# Altium PCB Control Board 4Layer.PcbDoc (part 1 of 2)
Units mm, origin at the board's own origin, x right, y up, seen from the top; angles counter-clockwise.
Board outline 113.54 x 134.37 mm, 4 copper layers (Top Layer, GND, Power, Bottom Layer), stack 0.603 mm thick; 245 components, 154 nets, 759 pads, 365 vias.
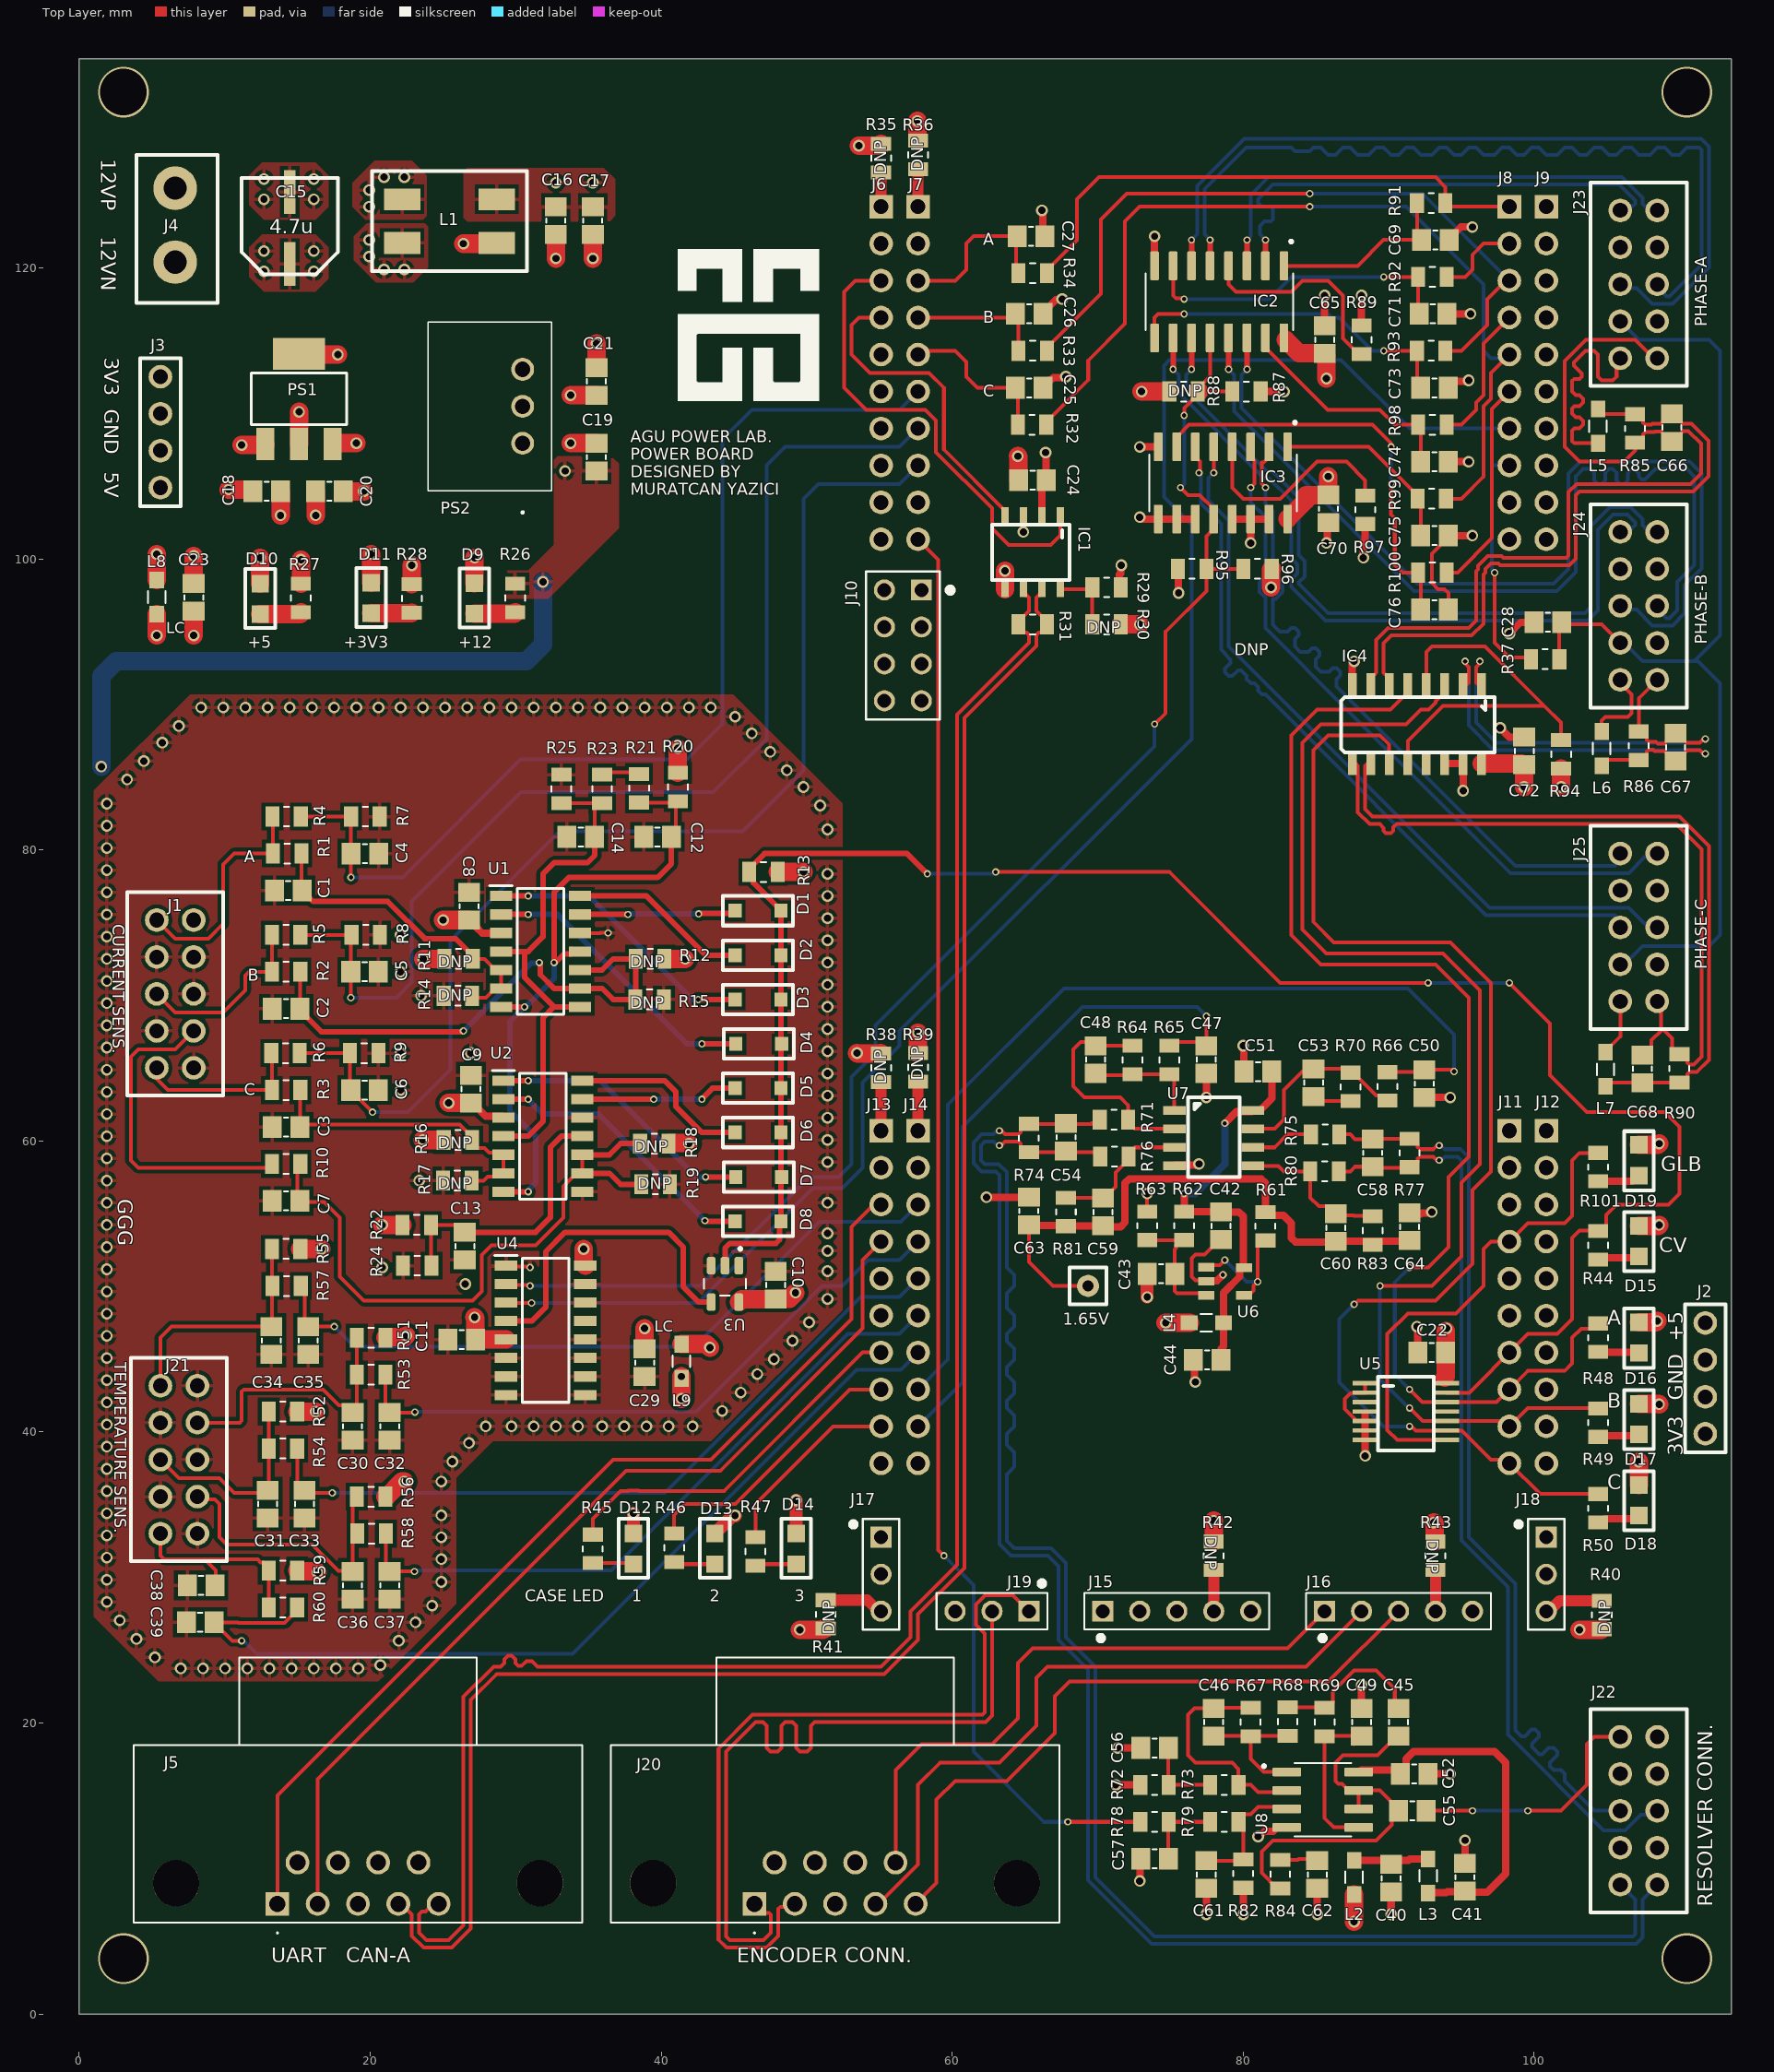
[diagram p0: Top Layer view]
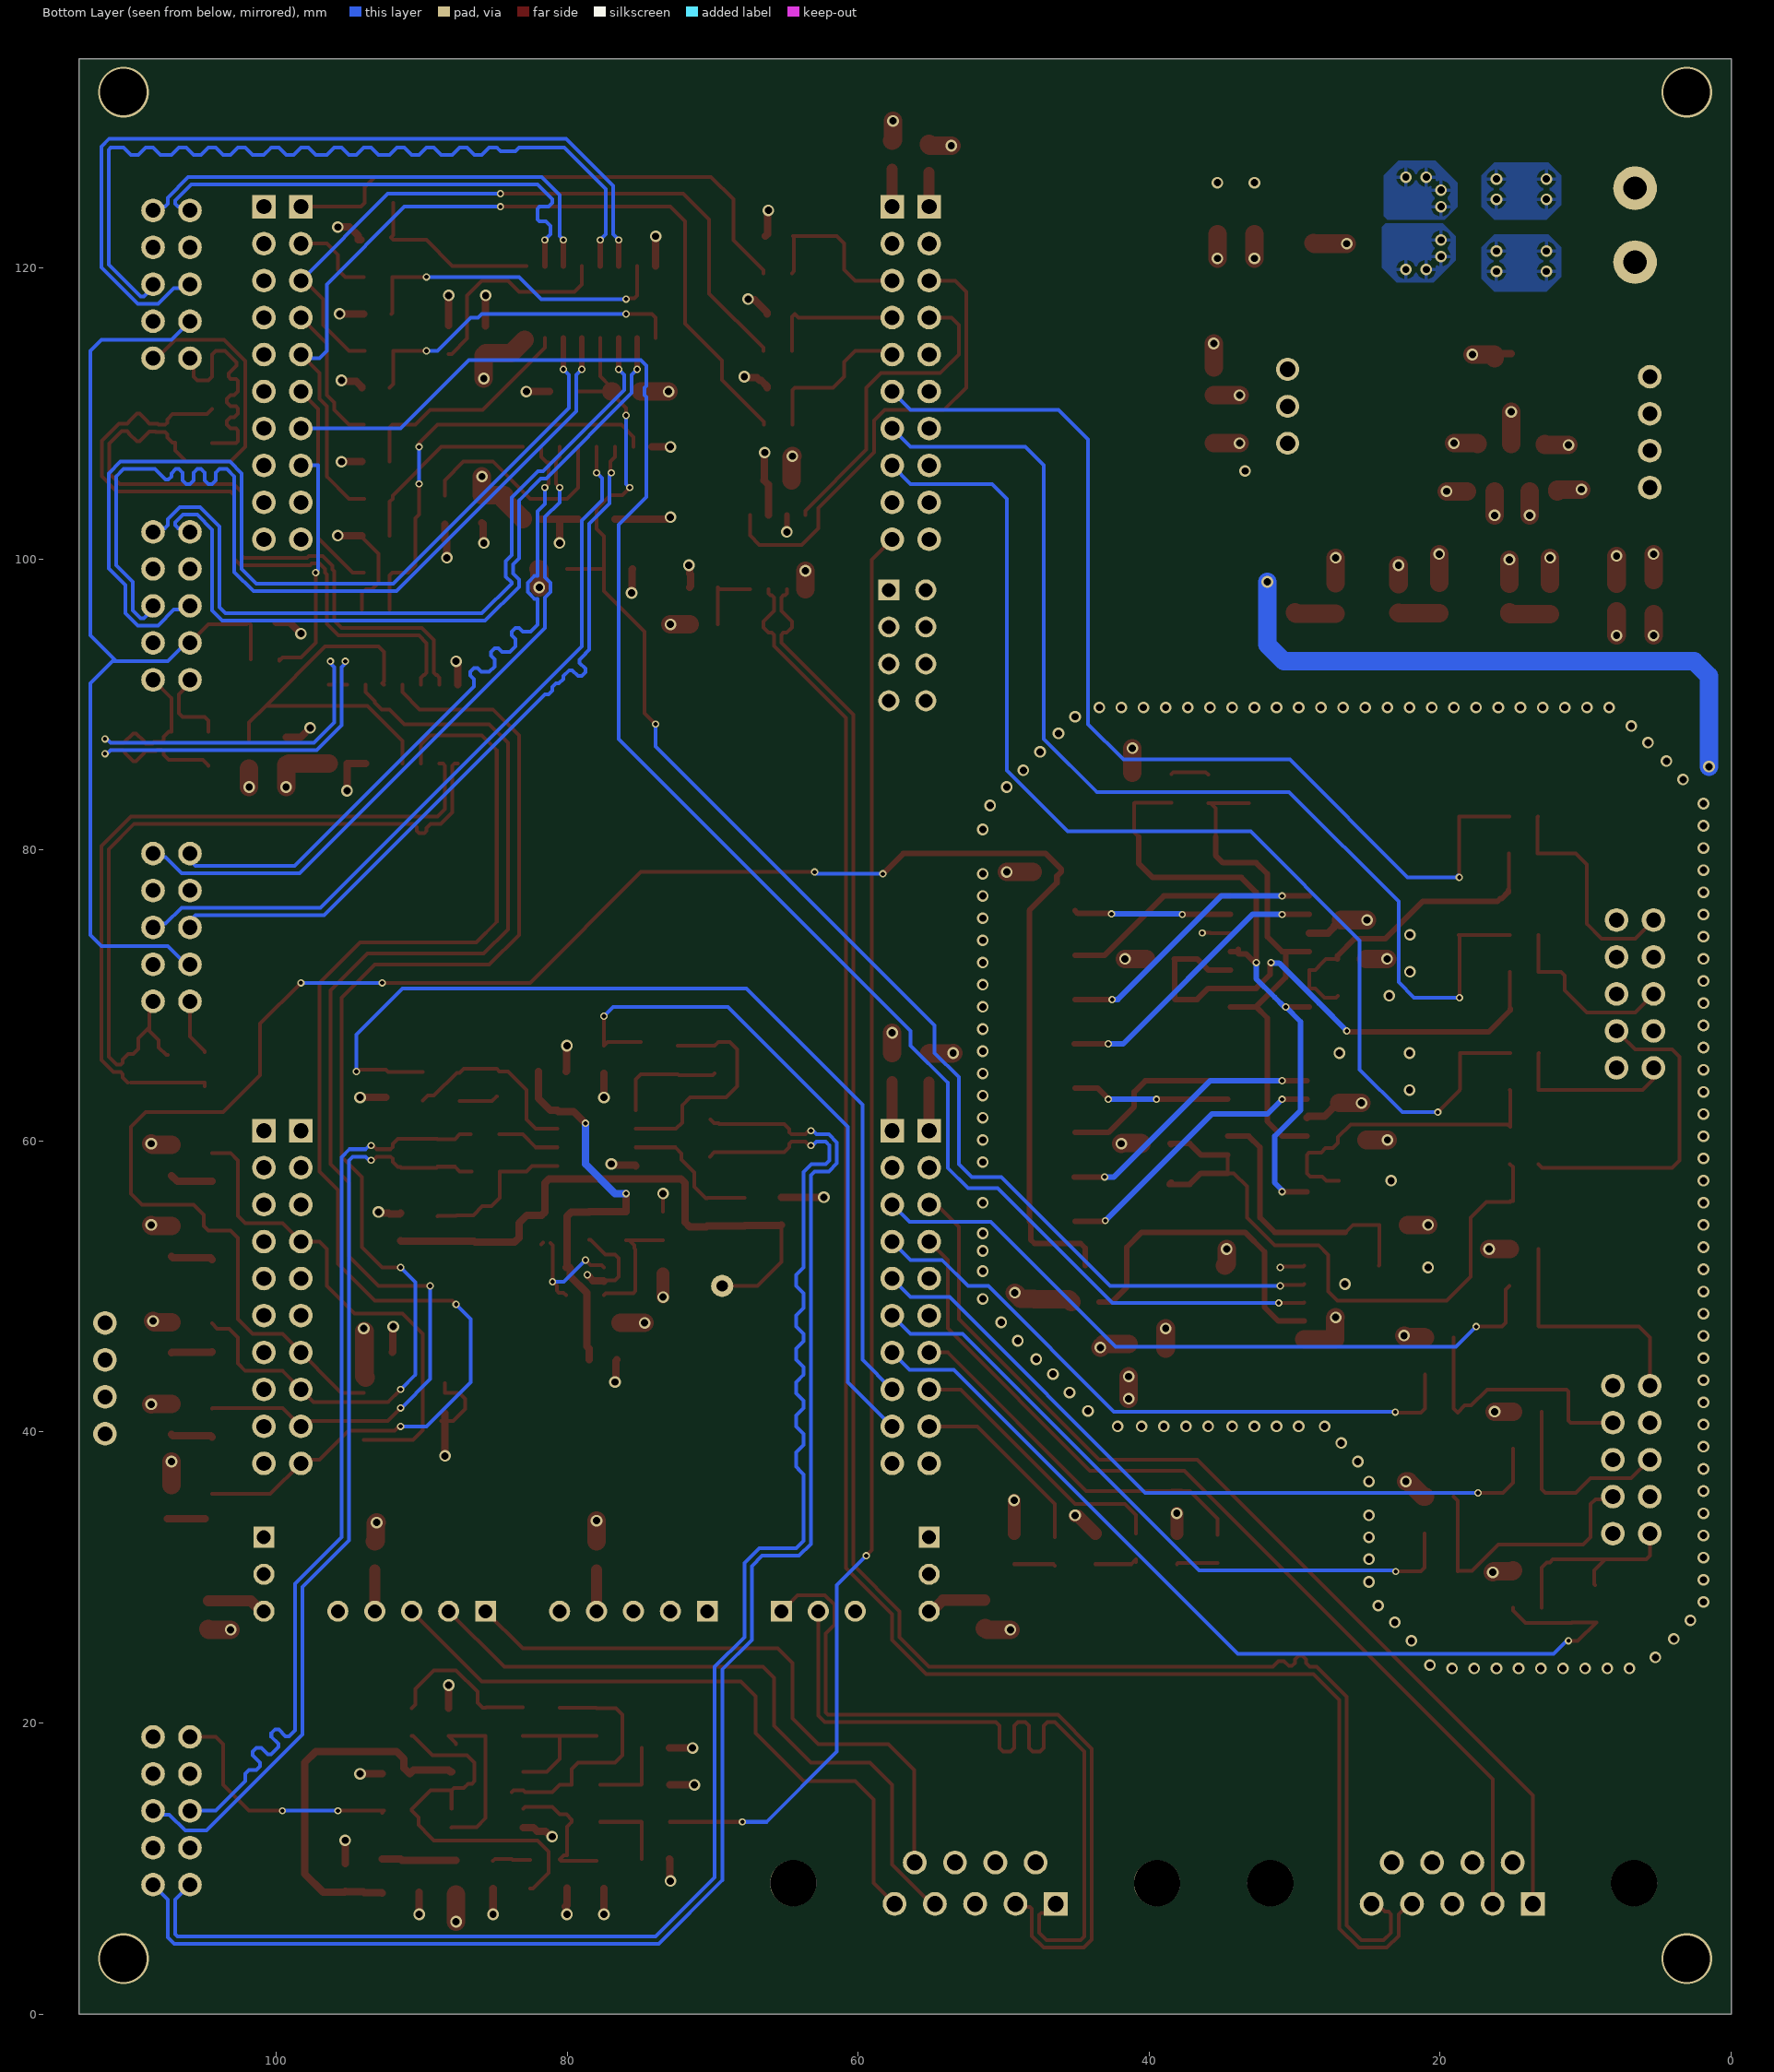
[diagram p1: Bottom Layer view, seen from below]
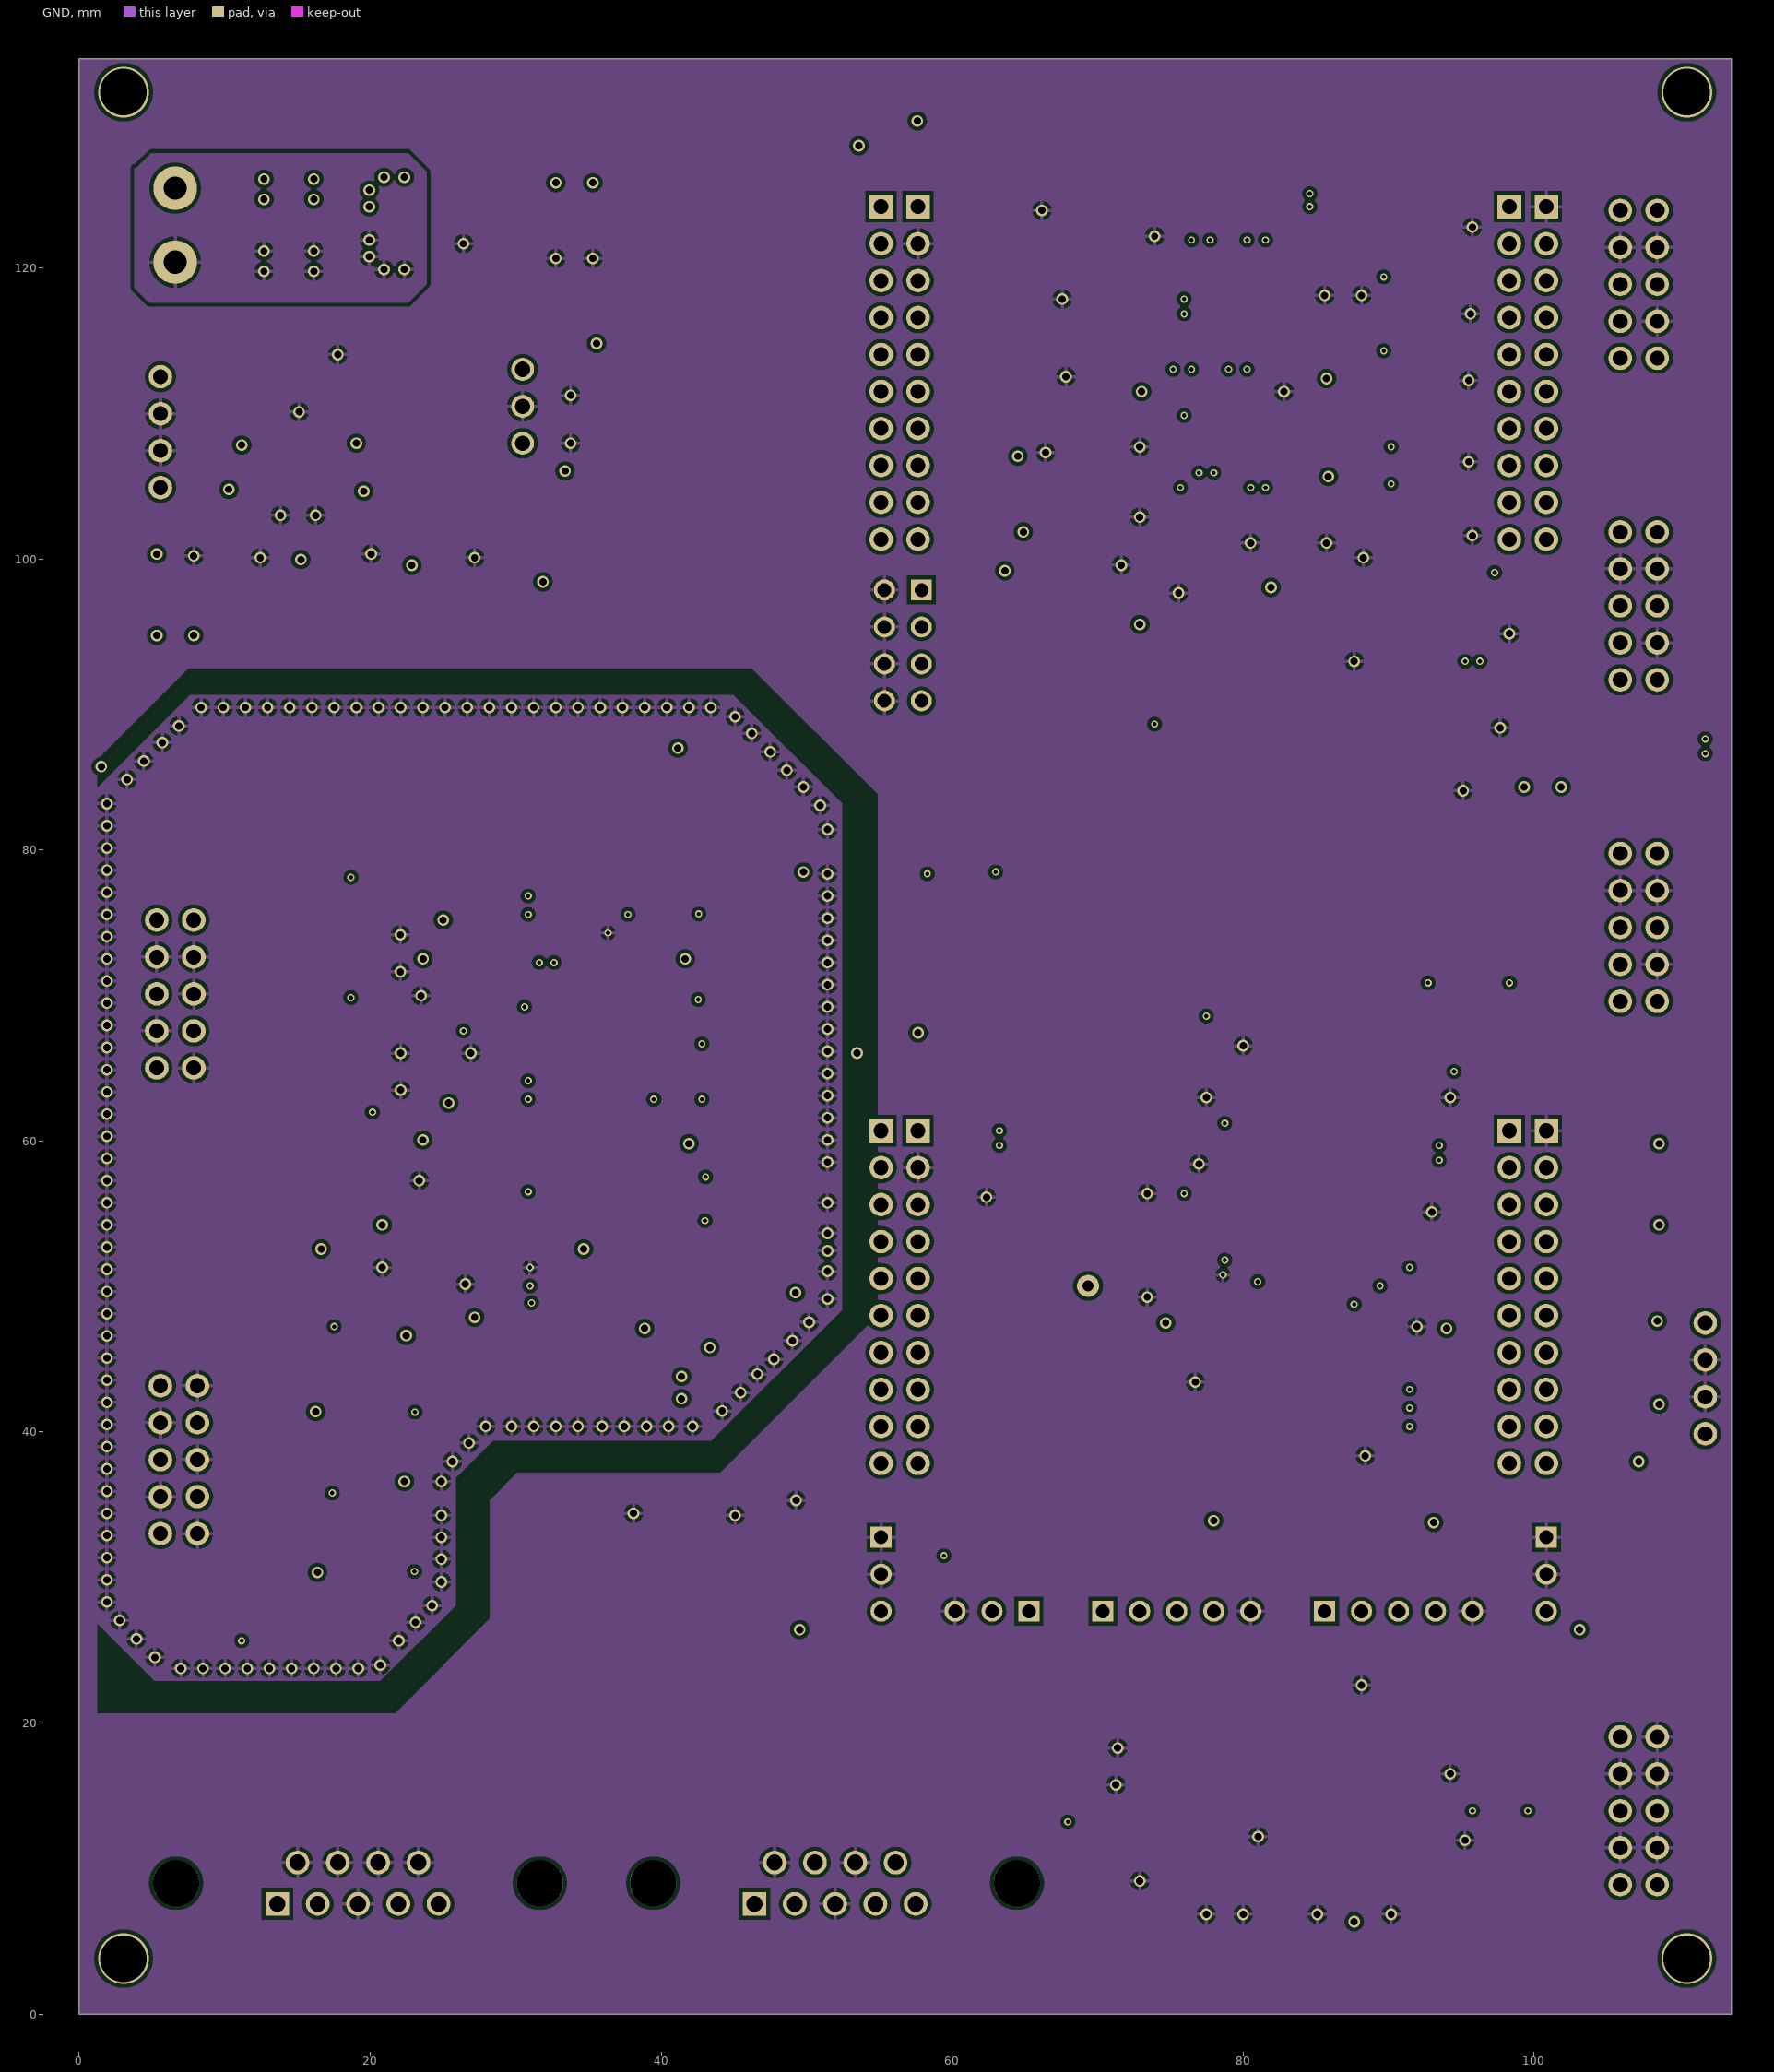
[diagram p2: GND]
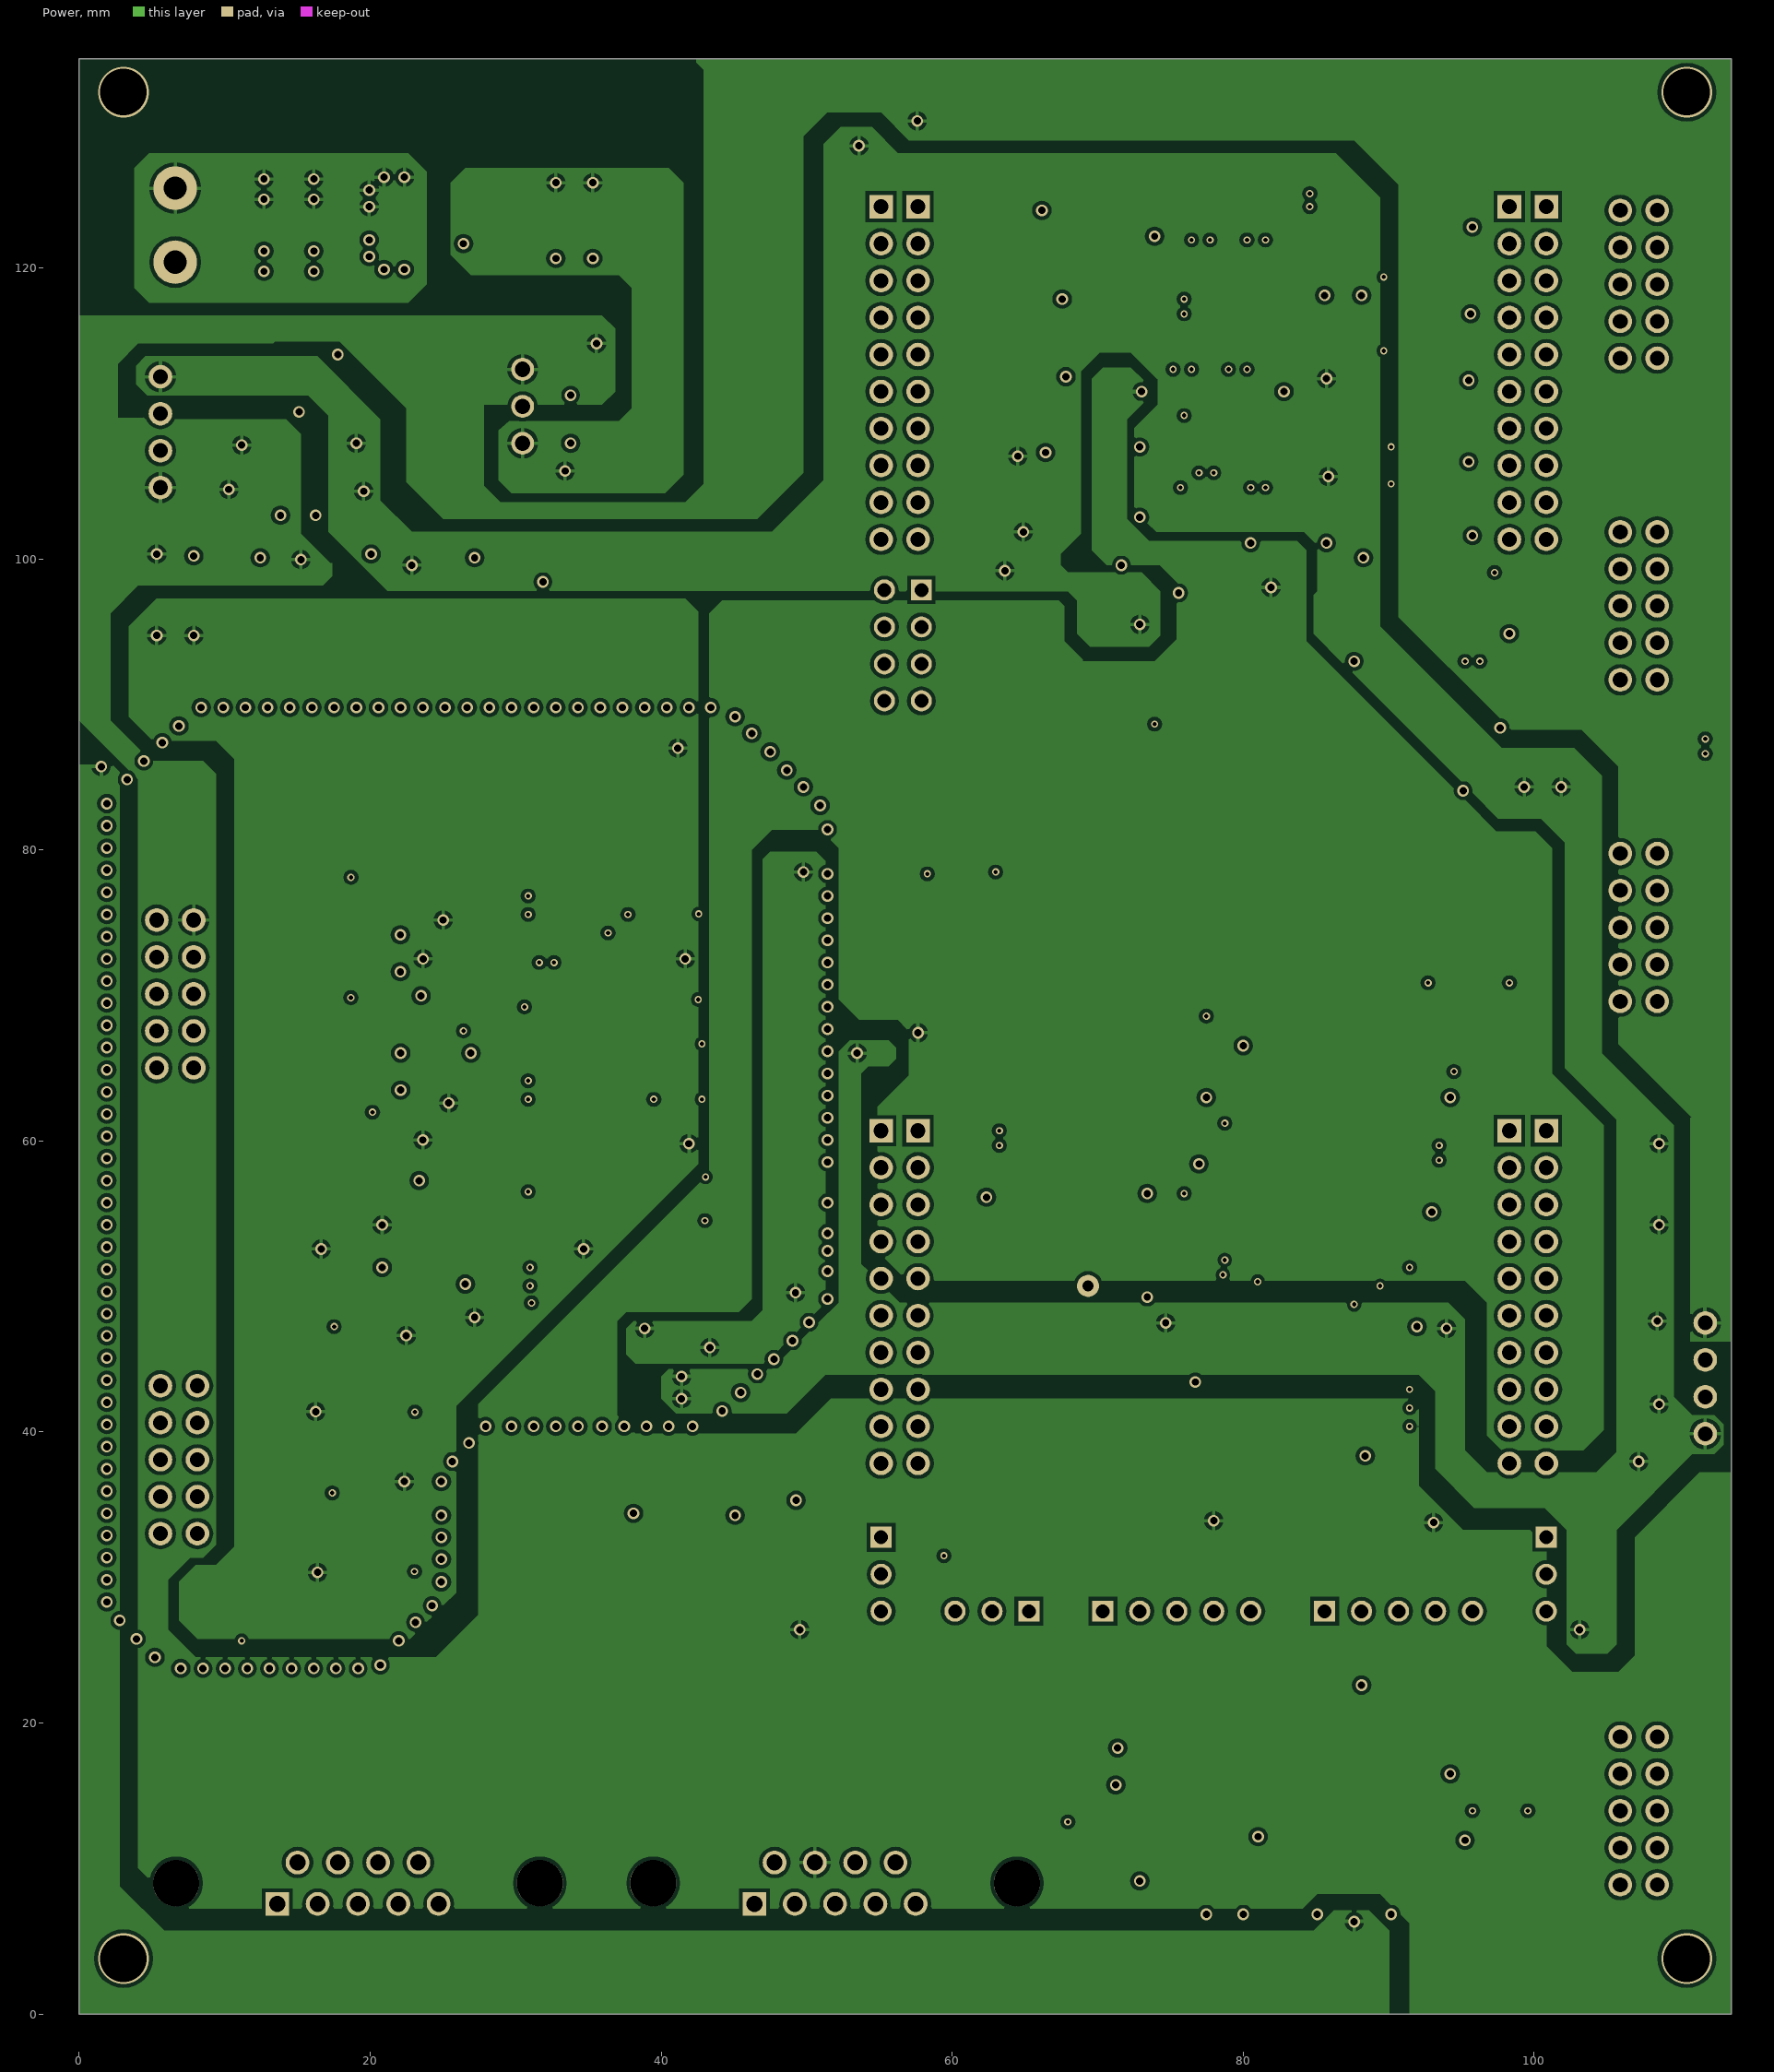
[diagram p3: Power]

## Layer stack, top to bottom
Top Solder: solder mask 0.0102, Solder Resist, Dk 3.5
Top Layer: signal copper 0.0356
Dielectric 2: prepreg 0.0711, PP-006, Dk 4.1
GND: signal copper 0.035
Dielectric 3: prepreg 0.0711, PP-006, Dk 4.1
Power: signal copper 0.035
Dielectric 1: dielectric 0.32, FR-4, Dk 4.8
Bottom Layer: signal copper 0.0356
Bottom Solder: solder mask 0.0102, Solder Resist, Dk 3.5

## Board outline
0,0 113.538,0 113.538,134.366 0,134.366

## Design rules (kind name [scope] priority, off if disabled: settings)
Clearance [All] p1: gap=0.254 ignorepadtopadclearanceinfootprint=FALSE except(0: Arc-Hole Track-Hole SMDPad-Hole THPad-Hole Via-Hole Fill-Hole Poly-Hole Region-Hole Text-Hole)
DiffPairsRouting [All] p1: maxlimit=0.254 minlimit=0.254 mostfreqgap=0.254 toplayer_minwidth=0.254 toplayer_maxwidth=2.54 toplayer_prefwidth=0.254 midlayer1_minwidth=0.381 midlayer1_maxwidth=0.381 midlayer1_prefwidth=0.381 midlayer2_minwidth=0.381 midlayer2_maxwidth=0.381 midlayer2_prefwidth=0.381 bottomlayer_minwidth=0.254 bottomlayer_maxwidth=2.54 bottomlayer_prefwidth=0.254 maxuncoupledlength=12.7
HoleSize [All] p1: absolutevalues=TRUE maxlimit=5.08 minlimit=0.2 maxpercent=80.000 minpercent=20.000
HoleToHoleClearance [All] p1: gap=0.5 allowstackedmicrovias=TRUE
MinimumSolderMaskSliver [All] p1: minsoldermaskwidth=0
PolygonConnect [All] p1: connectstyle=Relief reliefconductorwidth=0.254 reliefentries=4 polygonreliefangle="90 Angle" airgapwidth=0.254
RoutingVias [All] p1: holewidth=0.711 width=1.27 viastyle="Through Hole" minholewidth=0.2 minwidth=0.4 maxholewidth=2.54 maxwidth=2.54
SilkToSilkClearance [All] p1: silktosilkclearance=0
SilkToSolderMaskClearance [IsPad] p1: minsilkscreentomaskgap=0 clearancetoexposedcopper=TRUE
SolderMaskExpansion [All] p1: expansion=0.102 istentingtop=FALSE
Width [All] p1: maxlimit=2.54 minlimit=0.254 preferedwidth=0.254 midlayer1_maxwidth=0.254 midlayer2_maxwidth=0.254 minimp=50.000000 maximp=50.000000 favimp=50.000000
24 further rules are at their usual default settings.

## Classes and differential pairs
differential pair class DIFF90: A-FAULT-FILT AHS_PWM ALS_PWM B-FAULT-FILT BHS_PWM BLS_PWM C-FAULT-FILT CANA CANB CHS_PWM CLS_PWM COS SIN
component class "Voltage Sensor Interface": C25 C26 C27 R32 R33 R34
component class "Temp Sensor Interface": C30 C31 C32 C33 C34 C35 C36 C37 C38 C39 J21 R51 R52 R53 R54 R55 R56 R57 R58 R59 R60
component class Resolver: 1.65V C40 C41 C42 C43 C44 C45 C46 C47 C48 C49 C50 C51 C52 C53 C54 C55 C56 C57 C58 C59 C60 C61 C62 C63 C64 J22 L2 L3 L4 R61 R62 R63 R64 R65 R66 R67 R68 R69 R70 R71 R72 R73 R74 R75 R76 R77 R78 R79 R80 R81 R82 R83 R84 U6 U7 U8
component class PowerSupply: C15 C16 C17 C18 C19 C20 C21 C23 C29 D9 D10 D11 J2 J3 J4 L1 L8 L9 PS1 PS2 R26 R27 R28
component class Launchpad.~(23): C22 C28 D12 D13 D14 D15 D16 D17 D18 D19 J6 J7 J8 J9 J10 J11 J12 J13 J14 J15 J16 J17 J18 J19 J20 R35 R36 R37 R38 R39 R40 R41 R42 R43 R44 R45 R46 R47 R48 R49 R50 R101 U5
component class "Gate Driver Interface": C65 C66 C67 C68 C69 C70 C71 C72 C73 C74 C75 C76 IC2 IC3 IC4 J23 J24 J25 L5 L6 L7 R85 R86 R87 R88 R89 R90 R91 R92 R93 R94 R95 R96 R97 R98 R99 R100
component class FaultCircuit: C8 C9 C10 C11 C12 C13 C14 D1 D2 D3 D4 D5 D6 D7 D8 R11 R12 R13 R14 R15 R16 R17 R18 R19 R20 R21 R22 R23 R24 R25 U1 U2 U3 U4
component class "Current Sensor Interface": C1 C2 C3 C4 C5 C6 C7 J1 R1 R2 R3 R4 R5 R6 R7 R8 R9 R10
component class CAN: C24 IC1 J5 R29 R30 R31
differential pair SIN: +SIN_P -SIN_N
differential pair COS: +COS_P -COS_N
differential pair CLS_PWM: +CLS_PWM_P -CLS_PWM_N
differential pair CHS_PWM: +CHS_PWM_P -CHS_PWM_N
differential pair CANB: +CANB_P -CANB_N
differential pair CANA: +CANA_P -CANA_N
differential pair C-FAULT-FILT: +C-FAULT-FILT_P -C-FAULT-FILT_N
differential pair BLS_PWM: +BLS_PWM_P -BLS_PWM_N
differential pair BHS_PWM: +BHS_PWM_P -BHS_PWM_N
differential pair B-FAULT-FILT: +B-FAULT-FILT_P -B-FAULT-FILT_N
differential pair ALS_PWM: +ALS_PWM_P -ALS_PWM_N
differential pair AHS_PWM: +AHS_PWM_P -AHS_PWM_N
differential pair A-FAULT-FILT: +A-FAULT-FILT_P -A-FAULT-FILT_N

## Components (designator, comment, footprint, x,y, rotation, side; value= is the part's Value field where it differs from the comment)
1.65V "Test" TestPoint 69.342,50.038 r90 top (schematic designator 5)
C1 "33nF" "CAP 0805(2012 metric)" 14.366,77.216 r180 top
C2 "33nF" "CAP 0805(2012 metric)" 14.224,69.088 r180 top
C3 "33nF" "CAP 0805(2012 metric)" 14.224,60.96 r180 top
C4 "10nF" "CAP 0805(2012 metric)" 19.634,79.756 r0 top
C5 "10nF" "CAP 0805(2012 metric)" 19.624,71.628 r0 top
C6 "10nF" "CAP 0805(2012 metric)" 19.624,63.5 r0 top
C7 "33nF" "CAP 0805(2012 metric)" 14.224,55.88 r180 top
C8 "0.1uF" "CAP 0805(2012 metric)" 26.797,76.139 r270 top
C9 "0.1uF" "CAP 0805(2012 metric)" 26.924,63.566 r270 top
C10 "0.1uF" "CAP 0805(2012 metric)" 47.879,50.099 r90 top
C11 "0.1uF" "CAP 0805(2012 metric)" 26.289,46.355 r180 top
C12 "0.1uF" "CAP 0805(2012 metric)" 39.751,80.899 r180 top
C13 "0.1uF" "CAP 0805(2012 metric)" 26.505,52.771 r270 top
C14 "0.1uF" "CAP 0805(2012 metric)" 34.483,80.899 r180 top
C15 "47uF 25V" EEE-HC1E470XP 14.478,122.745 r0 top
C16 "10uF" "CAP 0805(2012 metric)" 32.766,123.256 r270 top
C17 "0.1uF 100V" "CAP 0805(2012 metric)" 35.306,123.256 r270 top
C18 "10uF" "CAP 0805(2012 metric)" 12.888,104.648 r180 top
C19 "10uF" "CAP 0805(2012 metric)" 35.56,107 r270 top
C20 "10uF" "CAP 0805(2012 metric)" 17.206,104.648 r0 top
C21 "10uF" "CAP 0805(2012 metric)" 35.56,112.202 r90 top
C22 "0.1uF" "CAP 0805(2012 metric)" 92.964,45.466 r180 top
C23 "1uF" "CAP 0805(2012 metric)" 7.874,97.348 r270 top
C24 "0.1uF" "CAP 0805(2012 metric)" 65.532,105.41 r0 top
C25 "220nF" "CAP 0805(2012 metric)" 65.306,111.76 r0 top
C26 "220nF" "CAP 0805(2012 metric)" 65.306,116.84 r0 top
C27 "220nF" "CAP 0805(2012 metric)" 65.428,122.174 r0 top
C28 "1nF" "CAP 0805(2012 metric)" 100.942,95.646 r180 top
C29 "1uF" "CAP 0805(2012 metric)" 38.862,44.77 r90 top
C30 "0.1uF 50V" "CAP 0805(2012 metric)" 18.796,40.386 r270 top
C31 "0.1uF 50V" "CAP 0805(2012 metric)" 12.954,35.052 r270 top
C32 "0.1uF 50V" "CAP 0805(2012 metric)" 21.336,40.386 r270 top
C33 "0.1uF 50V" "CAP 0805(2012 metric)" 15.494,35.052 r270 top
C34 "0.1uF 50V" "CAP 0805(2012 metric)" 13.208,46.294 r270 top
C35 "0.1uF 50V" "CAP 0805(2012 metric)" 15.748,46.294 r270 top
C36 "0.1uF 50V" "CAP 0805(2012 metric)" 18.796,29.464 r270 top
C37 "0.1uF 50V" "CAP 0805(2012 metric)" 21.336,29.464 r270 top
C38 "0.1uF 50V" "CAP 0805(2012 metric)" 8.382,29.464 r180 top
C39 "0.1uF 50V" "CAP 0805(2012 metric)" 8.316,26.924 r180 top
C40 "1u" "CAP 0805(2012 metric)" 90.17,9.332 r270 top
C41 "1u" "CAP 0805(2012 metric)" 95.25,9.398 r90 top
C42 "0.1uF" "CAP 0805(2012 metric)" 78.486,54.168 r90 top
C43 "0.1uF" "CAP 0805(2012 metric)" 74.356,50.866 r180 top
C44 "1u" "CAP 0805(2012 metric)" 77.536,44.958 r180 top
C45 "4.7n" "CAP 0805(2012 metric)" 90.678,20.066 r90 top
C46 "220p" "CAP 0805(2012 metric)" 77.978,20.066 r90 top
C47 "1n" "CAP 0805(2012 metric)" 77.47,65.598 r270 top
C48 "330p" "CAP 0805(2012 metric)" 69.85,65.598 r90 top
C49 "1n" "CAP 0805(2012 metric)" 88.138,20.066 r270 top
C50 "1n" "CAP 0805(2012 metric)" 92.456,63.942 r270 top
C51 "0.1uF" "CAP 0805(2012 metric)" 81.026,64.77 r180 top
C52 "0.1uF" "CAP 0805(2012 metric)" 91.76,16.51 r180 top
C53 "330p" "CAP 0805(2012 metric)" 84.836,64.008 r90 top
C54 "47p" "CAP 0805(2012 metric)" 67.818,60.264 r270 top
C55 "1u" "CAP 0805(2012 metric)" 91.628,13.97 r180 top
C56 "1n" "CAP 0805(2012 metric)" 73.914,18.288 r180 top
C57 "1n" "CAP 0805(2012 metric)" 73.914,10.668 r0 top
C58 "47p" "CAP 0805(2012 metric)" 88.9,59.182 r90 top
C59 "330p" "CAP 0805(2012 metric)" 70.358,55.118 r270 top
C60 "330p" "CAP 0805(2012 metric)" 86.36,54.036 r270 top
C61 "220p" "CAP 0805(2012 metric)" 77.47,9.586 r270 top
C62 "47n" "CAP 0805(2012 metric)" 85.09,9.586 r270 top
C63 "0.1uF" "CAP 0805(2012 metric)" 65.278,55.184 r90 top
C64 "0.1uF" "CAP 0805(2012 metric)" 91.44,54.102 r90 top
C65 "0.1uF" "CAP 0805(2012 metric)" 85.598,115.062 r90 top
C66 "27pF" "CAP 0805(2012 metric)" 109.474,109.032 r270 top
C67 "27pF" "CAP 0805(2012 metric)" 109.728,87.056 r90 top
C68 "27pF" "CAP 0805(2012 metric)" 107.442,64.958 r90 top
C69 "100pF" "CAP 0805(2012 metric)" 93.218,121.92 r0 top
C70 "0.1uF" "CAP 0805(2012 metric)" 85.852,103.444 r270 top
C71 "100pF" "CAP 0805(2012 metric)" 93.04,116.84 r0 top
C72 "0.1uF" "CAP 0805(2012 metric)" 99.314,86.802 r270 top
C73 "100pF" "CAP 0805(2012 metric)" 93.152,111.76 r0 top
C74 "100pF" "CAP 0805(2012 metric)" 93.152,106.68 r0 top
C75 "100pF" "CAP 0805(2012 metric)" 93.152,101.6 r0 top
C76 "100pF" "CAP 0805(2012 metric)" 93.152,96.52 r0 top
D1 "SS1040L_R1_00001" SOD123 46.66,75.819 r0 top
D2 "SS1040L_R1_00001" SOD123 46.66,72.771 r0 top
D3 "SS1040L_R1_00001" SOD123 46.66,69.723 r0 top
D4 "SS1040L_R1_00001" SOD123 46.711,66.675 r0 top
D5 "SS1040L_R1_00001" SOD123 46.66,63.627 r0 top
D6 "SS1040L_R1_00001" SOD123 46.66,60.579 r0 top
D7 "SS1040L_R1_00001" SOD123 46.711,57.531 r0 top
D8 "SS1040L_R1_00001" SOD123 46.66,54.483 r0 top
D9 "LED 17-21/Y2C-AN1P2/3T" 17-21/Y2C-AN1P2/3T 27.178,97.282 r270 top
D10 "LED 17-21/Y2C-AN1P2/3T" 17-21/Y2C-AN1P2/3T 12.446,97.248 r270 top
D11 "LED 17-21/Y2C-AN1P2/3T" 17-21/Y2C-AN1P2/3T 20.066,97.316 r270 top
D12 "LED 17-21/Y2C-AN1P2/3T" 17-21/Y2C-AN1P2/3T 38.1,31.97 r270 top
D13 "LED 17-21/Y2C-AN1P2/3T" 17-21/Y2C-AN1P2/3T 43.688,31.97 r270 top
D14 "LED 17-21/Y2C-AN1P2/3T" 17-21/Y2C-AN1P2/3T 49.276,31.97 r270 top
D15 "LED 17-21/Y2C-AN1P2/3T" 17-21/Y2C-AN1P2/3T 107.188,53.12 r90 top
D16 "LED 17-21/Y2C-AN1P2/3T" 17-21/Y2C-AN1P2/3T 107.188,46.482 r90 top
D17 "LED 17-21/Y2C-AN1P2/3T" 17-21/Y2C-AN1P2/3T 107.188,40.894 r90 top
D18 "LED 17-21/Y2C-AN1P2/3T" 17-21/Y2C-AN1P2/3T 107.188,35.302 r90 top
D19 "LED 17-21/Y2C-AN1P2/3T" 17-21/Y2C-AN1P2/3T 107.188,58.674 r90 top
IC1 "SN65HVD234DR" SN65HVD234DR 65.532,100.467 r270 top
IC2 "AM26LV31EIDR" SOIC127P600X175-16N#1 78.359,117.667 r270 top
IC3 "AM26LV31EIDR" SOIC127P600X175-16N#1 78.613,105.221 r270 top
IC4 "SN75LBC175ADR" SN75LBC175ADR 91.948,88.646 r270 top
J1 "2ROW10POS" 2ROW10POS 6.604,70.104 r0 top
J2 "4POS1ROW" "4POS 1 ROW" 111.76,43.688 r270 top
J3 "4POS1ROW" "4POS 1 ROW" 5.588,108.712 r90 top
J4 "2 POS CONN" "2 POS CONN" 6.604,122.936 r270 top
J5 "DS1037-09FNAKT74" "DSUB CONN 9 POS" 13.625,7.574 r180 top
J6 "1ROW10POS" 1ROW10POS 55.118,112.776 r0 top
J7 "1ROW10POS" 1ROW10POS 57.658,112.776 r0 top
J8 "1ROW10POS" 1ROW10POS 98.298,112.776 r0 top
J9 "1ROW10POS" 1ROW10POS 100.838,112.776 r0 top
J10 "2ROW8POS" 2ROW8POS 57.887,97.866 r0 top
J11 "1ROW10POS" 1ROW10POS 98.298,49.276 r0 top
J12 "1ROW10POS" 1ROW10POS 100.838,49.276 r0 top
J13 "1ROW10POS" 1ROW10POS 55.118,49.276 r0 top
J14 "1ROW10POS" 1ROW10POS 57.658,49.276 r0 top
J15 "1ROW5POS" 1ROW5POS 75.438,27.686 r90 top
J16 "1ROW5POS" 1ROW5POS 90.678,27.686 r90 top
J17 "1ROW3POS" 1ROW3POS 55.118,32.766 r0 top
J18 "1ROW3POS" 1ROW3POS 100.838,32.766 r0 top
J19 "1ROW3POS" 1ROW3POS 65.278,27.686 r270 top
J20 "DS1037-09FNAKT74" "DSUB CONN 9 POS" 46.415,7.574 r180 top
J21 "2ROW10POS" 2ROW10POS 6.858,38.1 r0 top
J22 "2ROW10POS" 2ROW10POS 107.188,13.97 r0 top
J23 "2ROW10POS" 2ROW10POS 107.188,118.872 r0 top
J24 "2ROW10POS" 2ROW10POS 107.188,96.774 r0 top
J25 "2ROW10POS" 2ROW10POS 107.188,74.676 r0 top
L1 "CMC" ACM7060-701-2PL-TL01 25.452,123.214 r0 top
L2 "1uH" "IND 0805" 87.63,9.398 r90 top
L3 "1uH" "IND 0805" 92.71,9.493 r270 top
L4 "1uH" "IND 0805" 77.47,47.498 r0 top
L5 "1uH" "IND 0805" 104.394,109.125 r90 top
L6 "1uH" "IND 0805" 104.648,86.963 r270 top
L7 "1uH" "IND 0805" 104.902,64.929 r270 top
L8 "1uH" "IND 0805" 5.334,97.377 r90 top
L9 "1uH" "IND 0805" 41.402,44.863 r270 top
PS1 "AP2114HA-3.3TRG1" SOT230P700X180-4N 15.113,110.998 r0 top
PS2 "R-78E5.0-1.0" R78E5010 30.48,107.95 r90 top
R1 "1k" "RES 0805(2012 metric)" 14.3,79.756 r0 top
R2 "1k" "RES 0805(2012 metric)" 14.224,71.628 r0 top
R3 "1k" "RES 0805(2012 metric)" 14.224,63.5 r0 top
R4 "4K99" "RES 0805(2012 metric)" 14.262,82.296 r0 top
R5 "4K99" "RES 0805(2012 metric)" 14.224,74.168 r0 top
R6 "4K99" "RES 0805(2012 metric)" 14.186,66.04 r0 top
R7 "7k5ohm" "RES 0805(2012 metric)" 19.672,82.296 r180 top
R8 "7k5ohm" "RES 0805(2012 metric)" 19.698,74.168 r180 top
R9 "7k5ohm" "RES 0805(2012 metric)" 19.596,66.04 r180 top
R10 "1k" "RES 0805(2012 metric)" 14.224,58.42 r0 top
R11 "2k" "RES 0805(2012 metric)" 26.073,72.517 r0 top
R12 "2k" "RES 0805(2012 metric)" 39.243,72.517 r0 top
R13 "2k" "RES 0805(2012 metric)" 47.028,78.486 r0 top
R14 "2k" "RES 0805(2012 metric)" 26.035,69.977 r0 top
R15 "2k" "RES 0805(2012 metric)" 39.205,69.723 r0 top
R16 "2k" "RES 0805(2012 metric)" 26.035,60.071 r0 top
R17 "2k" "RES 0805(2012 metric)" 25.997,57.277 r0 top
R18 "2k" "RES 0805(2012 metric)" 39.535,59.817 r0 top
R19 "2k" "RES 0805(2012 metric)" 39.611,57.023 r0 top
R20 "1.24k" "RES 0805(2012 metric)" 41.148,84.328 r90 top
R21 "1.24k" "RES 0805(2012 metric)" 38.481,84.239 r270 top
R22 "1.24k" "RES 0805(2012 metric)" 23.203,54.229 r180 top
R23 "1.24k" "RES 0805(2012 metric)" 35.941,84.201 r90 top
R24 "1.24k" "RES 0805(2012 metric)" 23.241,51.435 r0 top
R25 "1.24k" "RES 0805(2012 metric)" 33.147,84.201 r270 top
R26 "1.24k" "RES 0805(2012 metric)" 29.972,97.32 r90 top
R27 "1.24k" "RES 0805(2012 metric)" 15.24,97.32 r90 top
R28 "1.24k" "RES 0805(2012 metric)" 22.86,97.282 r90 top
R29 "1.24k" "RES 0805(2012 metric)" 70.612,98.044 r0 top
R30 "1.24k" "RES 0805(2012 metric)" 70.612,95.504 r0 top
R31 "120ohm" "RES 0805(2012 metric)" 65.532,95.504 r0 top
R32 "2.2k" "RES 0805(2012 metric)" 65.494,109.22 r180 top
R33 "2.2k" "RES 0805(2012 metric)" 65.532,114.3 r180 top
R34 "2.2k" "RES 0805(2012 metric)" 65.532,119.634 r180 top
R35 "0 ohm" "RES 0805(2012 metric)" 55.118,127.546 r270 top
R36 "0 ohm" "RES 0805(2012 metric)" 57.658,127.762 r90 top
R37 "30" "RES 0805(2012 metric)" 100.754,93.106 r0 top
R38 "0 ohm" "RES 0805(2012 metric)" 55.118,65.024 r270 top
R39 "0 ohm" "RES 0805(2012 metric)" 57.658,65.062 r90 top
R40 "0 ohm" "RES 0805(2012 metric)" 104.648,27.432 r90 top
R41 "0 ohm" "RES 0805(2012 metric)" 51.308,27.47 r90 top
R42 "0 ohm" "RES 0805(2012 metric)" 77.978,31.496 r270 top
R43 "0 ohm" "RES 0805(2012 metric)" 93.218,31.496 r270 top
R44 "1.24k" "RES 0805(2012 metric)" 104.394,52.832 r270 top
R45 "120ohm" "RES 0805(2012 metric)" 35.306,31.966 r90 top
R46 "120ohm" "RES 0805(2012 metric)" 40.894,32.042 r90 top
R47 "120ohm" "RES 0805(2012 metric)" 46.482,31.788 r90 top
R48 "1.24k" "RES 0805(2012 metric)" 104.394,46.482 r270 top
R49 "1.24k" "RES 0805(2012 metric)" 104.394,40.64 r270 top
R50 "1.24k" "RES 0805(2012 metric)" 104.394,34.76 r270 top
R51 "10k" "RES 0805(2012 metric)" 20.066,46.482 r0 top
R52 "10k" "RES 0805(2012 metric)" 14.008,41.402 r0 top
R53 "1k" "RES 0805(2012 metric)" 20.066,43.942 r0 top
R54 "1k" "RES 0805(2012 metric)" 14.008,38.862 r0 top
R55 "10k" "RES 0805(2012 metric)" 14.224,52.578 r0 top
R56 "10k" "RES 0805(2012 metric)" 20.066,35.56 r0 top
R57 "1k" "RES 0805(2012 metric)" 14.262,50.038 r0 top
R58 "1k" "RES 0805(2012 metric)" 20.104,33.02 r0 top
R59 "10k" "RES 0805(2012 metric)" 14.008,30.48 r0 top
R60 "1k" "RES 0805(2012 metric)" 14.008,27.94 r0 top
R61 "47" "RES 0805(2012 metric)" 81.534,54.14 r90 top
R62 "10k" "RES 0805(2012 metric)" 75.946,54.168 r90 top
R63 "10k" "RES 0805(2012 metric)" 73.406,54.168 r270 top
R64 "10k" "RES 0805(2012 metric)" 72.39,65.57 r270 top
R65 "2k" "RES 0805(2012 metric)" 74.93,65.57 r90 top
R66 "2k" "RES 0805(2012 metric)" 89.916,63.754 r90 top
R67 "68k" "RES 0805(2012 metric)" 80.518,20.066 r270 top
R68 "3.3k" "RES 0805(2012 metric)" 83.058,20.104 r90 top
R69 "3.3k" "RES 0805(2012 metric)" 85.598,20.066 r270 top
R70 "10k" "RES 0805(2012 metric)" 87.376,63.716 r270 top
R71 "11k" "RES 0805(2012 metric)" 71.12,61.468 r0 top
R72 "10k" "RES 0805(2012 metric)" 73.914,15.748 r0 top
R73 "5.1k" "RES 0805(2012 metric)" 78.702,15.748 r0 top
R74 "47k" "RES 0805(2012 metric)" 65.278,60.198 r90 top
R75 "11k" "RES 0805(2012 metric)" 85.636,60.452 r0 top
R76 "11k" "RES 0805(2012 metric)" 71.158,58.928 r0 top
R77 "47k" "RES 0805(2012 metric)" 91.44,59.182 r270 top
R78 "10k" "RES 0805(2012 metric)" 73.914,13.208 r0 top
R79 "5.1k" "RES 0805(2012 metric)" 78.702,13.208 r0 top
R80 "11k" "RES 0805(2012 metric)" 85.598,57.912 r0 top
R81 "10k" "RES 0805(2012 metric)" 67.818,55.118 r90 top
R82 "68k" "RES 0805(2012 metric)" 80.01,9.652 r90 top
R83 "10k" "RES 0805(2012 metric)" 88.9,53.848 r90 top
R84 "47" "RES 0805(2012 metric)" 82.55,9.614 r270 top
R85 "100ohm" "RES 0805(2012 metric)" 106.934,108.966 r90 top
R86 "100ohm" "RES 0805(2012 metric)" 107.188,87.16 r270 top
R87 "0" "RES 0805(2012 metric)" 80.226,111.506 r180 top
R88 "0" "RES 0805(2012 metric)" 75.908,111.506 r180 top
R89 "15k" "RES 0805(2012 metric)" 88.138,115.062 r270 top
R90 "100ohm" "RES 0805(2012 metric)" 109.982,64.986 r270 top
R91 "120ohm" "RES 0805(2012 metric)" 92.926,124.46 r180 top
R92 "120ohm" "RES 0805(2012 metric)" 93.002,119.38 r180 top
R93 "120ohm" "RES 0805(2012 metric)" 92.926,114.3 r180 top
R94 "15k" "RES 0805(2012 metric)" 101.854,86.576 r270 top
R95 "15k" "RES 0805(2012 metric)" 76.492,99.314 r0 top
R96 "0 ohm" "RES 0805(2012 metric)" 80.988,99.314 r0 top
R97 "15k" "RES 0805(2012 metric)" 88.392,103.378 r90 top
R98 "120ohm" "RES 0805(2012 metric)" 93.002,109.22 r180 top
R99 "120ohm" "RES 0805(2012 metric)" 92.964,104.14 r180 top
R100 "120ohm" "RES 0805(2012 metric)" 93.002,99.06 r180 top
R101 "1.24k" "RES 0805(2012 metric)" 104.394,58.204 r270 top
U1 "LM339DT" SOIC127P600X175-14N 31.705,73.025 r0 top
U2 "LM339DT" SOIC127P600X175-14N 31.877,60.325 r0 top
U3 "SN74AHC1G14DBVR" SN74AHC1G14DBVR 44.389,50.18 r270 top
U4 "HEF4043BT,652" SOIC127P600X175-16N#2 32.062,46.99 r0 top
U5 "SN74HC21PRW" SN74HC21PWR 91.186,41.402 r0 top
U6 "TLV2771CD" TLV2771CD 78.77,50.358 r0 top
U7 "TLV2772CD" TLV2772CD 77.978,60.198 r0 top
U8 "OPA2209AID" OPA2209AID 85.344,14.732 r0 top

## Footprints (in the part's own frame and the unit in brackets; to place one, negate y for a bottom-side part, rotate by r counter-clockwise, add the part's x,y. Pads: shape width x height; smd on the part's side, far side on the other; paste and mask are expansions set on the pad)
1ROW3POS [mm]
  rect 1.45x1.45 hole 0.95 mask+0.1: 1(0,0)
  round 1.45 hole 0.95 mask+0.1: 2(0,-2.54) 3(0,-5.08)
  silkscreen extent -2.06,-6.35 1.25,1.27
1ROW5POS [mm]
  rect 1.45x1.45 hole 0.95 mask+0.1: 1(0,5.08)
  round 1.45 hole 0.95 mask+0.1: 2(0,2.54) 3(0,0) 4(0,-2.54) 5(0,-5.08)
  silkscreen extent -2.01,-6.35 1.25,6.35
1ROW10POS [mm]
  rect 1.62x1.62 hole 1.02 mask+0.1: 1(0,11.43)
  round 1.62 hole 1.02 mask+0.1: 2(0,8.89) 3(0,6.35) 4(0,3.81) 5(0,1.27) 6(0,-1.27) 7(0,-3.81) 8(0,-6.35) 9(0,-8.89) 10(0,-11.43)
"2 POS CONN" [mm]
  round 3 hole 1.6: 1(-2.54,0) 2(2.54,0)
  silkscreen extent -4.83,-2.67 5.33,2.92
2ROW8POS [mm]
  rect 1.45x1.45 hole 0.95 mask+0.1: 1(0,0)
  round 1.45 hole 0.95 mask+0.1: 2(-2.54,0) 3(0,-2.54) 4(-2.54,-2.54) 5(0,-5.08) 6(-2.54,-5.08) 7(0,-7.62) 8(-2.54,-7.62)
  silkscreen extent -3.81,-8.89 2.16,1.27
2ROW10POS [mm]
  round 1.62 hole 1.02: 1(-1.27,5.08) 2(1.27,5.08) 3(-1.27,2.54) 4(1.27,2.54) 5(-1.27,0) 6(1.27,0) 7(-1.27,-2.54) 8(1.27,-2.54) 9(-1.27,-5.08) 10(1.27,-5.08)
  silkscreen extent -3.3,-6.98 3.3,6.98
"4POS 1 ROW" [mm]
  round 1.62 hole 1.02: 1(-3.81,0) 2(-1.27,0) 3(1.27,0) 4(3.81,0)
  silkscreen extent -5.08,-1.4 5.08,1.4
17-21/Y2C-AN1P2/3T [mm]
  rect 1.2x1.2 smd: 1(-1.05,0) 2(1.05,0)
  silkscreen extent -2.07,-1.02 2,1.02
ACM7060-701-2PL-TL01 [mm]
  rect 2.5x1.5 smd: 1(-3.25,1.5) 2(-3.25,-1.5) 3(3.25,-1.5) 4(3.25,1.5)
  silkscreen extent -5.33,-3.43 5.33,3.43
"CAP 0805(2012 metric)" [mm]
  rect 1.3x1.5 smd: 1(-0.95,0) 2(0.95,0)
  silkscreen extent -0.15,-0.65 0.15,0.65
"DSUB CONN 9 POS" [mm]
  rect 1.635x1.635 hole 1.09: 1(0,0)
  round 1.635 hole 1.09: 2(-2.77,0) 3(-5.54,0) 4(-8.31,0) 5(-11.08,0) 6(-1.385,-2.84) 7(-4.155,-2.84) 8(-6.925,-2.84) 9(-9.695,-2.84)
  round 3.18 hole 3.18 unplated: ""(-18.04,-1.42) ""(6.96,-1.42)
  silkscreen extent -20.95,-16.92 9.86,2.05
EEE-HC1E470XP [mm]
  rect 0.8x3 smd: 1(0,2.476) 2(0,-2.476)
  silkscreen extent -3.3,-3.17 3.3,3.43
"IND 0805" [mm]
  rect 1.15x1 smd: 1(-1.175,0) 2(1.175,0)
  silkscreen extent -0.4,-0.6 0.4,0.6
OPA2209AID [mm]
  rrect25% 1.97x0.6 smd: 1(-2.343,1.905) 2(-2.343,0.635) 3(-2.343,-0.635) 4(-2.343,-1.905) 5(2.597,-1.905) 6(2.597,-0.635) 7(2.597,0.635) 8(2.597,1.905)
  silkscreen extent -4.01,-2.52 2.08,2.52
R78E5010 [mm]
  round 1.575 hole 1.05: 1(0,0) 2(2.54,0) 3(5.08,0)
  silkscreen extent -4.8,-2 8.34,6.5, body extent -3.26,-2 8.34,6.5, height 10.5
"RES 0805(2012 metric)" [mm]
  rect 0.96x1.38 smd: 1(-0.978,0) 2(0.978,0)
  silkscreen extent -0.18,-0.68 0.18,0.68
SN65HVD234DR [mm]
  rect 1.1x0.51 smd: 1(-2.55,1.905) 2(-2.55,0.635) 3(-2.55,-0.635) 4(-2.55,-1.905) 5(2.55,-1.905) 6(2.55,-0.635) 7(2.55,0.635) 8(2.55,1.905)
  silkscreen extent -1.9,-2.79 1.91,2.54
SN74AHC1G14DBVR [mm]
  rrect50% 1.21x0.59 smd: 1(-1.255,0.95) 2(-1.255,0) 3(-1.255,-0.95) 4(1.255,-0.95) 5(1.255,0.95)
  silkscreen extent -2.51,-1.45 0.8,1.45
SN74HC21PWR [mm]
  rect 1.7x0.3 smd: 1(-2.8,1.95) 2(-2.8,1.3) 3(-2.8,0.65) 4(-2.8,0) 5(-2.8,-0.65) 6(-2.8,-1.3) 7(-2.8,-1.95) 8(2.8,-1.95) 9(2.8,-1.3) 10(2.8,-0.65) 11(2.8,0) 12(2.8,0.65) 13(2.8,1.3) 14(2.8,1.95)
  silkscreen extent -1.91,-2.67 1.91,2.41
SN75LBC175ADR [mm]
  rect 1.6x0.6 smd: 1(-2.7,4.445) 2(-2.7,3.175) 3(-2.7,1.905) 4(-2.7,0.635) 5(-2.7,-0.635) 6(-2.7,-1.905) 7(-2.7,-3.175) 8(-2.7,-4.445) 9(2.7,-4.445) 10(2.7,-3.175) 11(2.7,-1.905) 12(2.7,-0.635) 13(2.7,0.635) 14(2.7,1.905) 15(2.7,3.175) 16(2.7,4.445)
  silkscreen extent -1.87,-5.21 1.94,5.33
SOD123 [mm]
  rect 0.9x0.95 smd: 1(-1.575,0) 2(1.575,0)
  silkscreen extent -2.41,-1.02 2.41,1.02
SOIC127P600X175-14N [mm]
  rect 1.525x0.7 smd: 1(-2.712,3.81) 2(-2.712,2.54) 3(-2.712,1.27) 4(-2.712,0) 5(-2.712,-1.27) 6(-2.712,-2.54) 7(-2.712,-3.81) 8(2.712,-3.81) 9(2.712,-2.54) 10(2.712,-1.27) 11(2.712,0) 12(2.712,1.27) 13(2.712,2.54) 14(2.712,3.81)
  silkscreen extent -3.47,-4.33 1.6,4.51, body extent -3,-4.33 3,4.33, height 1.75
SOIC127P600X175-16N#1 [mm]
  rrect25% 1.97x0.6 smd: 1(-2.475,4.445) 2(-2.475,3.175) 3(-2.475,1.905) 4(-2.475,0.635) 5(-2.475,-0.635) 6(-2.475,-1.905) 7(-2.475,-3.175) 8(-2.475,-4.445) 9(2.475,-4.445) 10(2.475,-3.175) 11(2.475,-1.905) 12(2.475,-0.635) 13(2.475,0.635) 14(2.475,1.905) 15(2.475,3.175) 16(2.475,4.445)
  silkscreen extent -4.24,-5.06 1.95,5.06
SOIC127P600X175-16N#2 [mm]
  rect 1.55x0.7 smd: 1(-2.725,4.445) 2(-2.725,3.175) 3(-2.725,1.905) 4(-2.725,0.635) 5(-2.725,-0.635) 6(-2.725,-1.905) 7(-2.725,-3.175) 8(-2.725,-4.445) 9(2.725,-4.445) 10(2.725,-3.175) 11(2.725,-1.905) 12(2.725,-0.635) 13(2.725,0.635) 14(2.725,1.905) 15(2.725,3.175) 16(2.725,4.445)
  silkscreen extent -3.5,-4.95 1.6,5.15, body extent -3,-4.95 3,4.95, height 1.75
SOT230P700X180-4N [mil]
  rect 48x88 smd: 1(-91,-122) 2(0,-122) 3(91,-122)
  rect 141.73x86.61 smd: 4(0,122.01)
  silkscreen extent -129,-70 129,70
TestPoint [mil]
  round 60 hole 30: 1(0,0)
  silkscreen extent -50,-50 50,50
TLV2771CD [mm]
  rect 1.1x0.6 smd: 1(-1.3,0.96) 2(-1.3,0) 3(-1.3,-0.96) 4(1.3,-0.96) 5(1.3,0.94)
TLV2772CD [mm]
  rect 1.55x0.6 smd: 1(-2.7,1.905) 2(-2.7,0.635) 3(-2.7,-0.635) 4(-2.7,-1.905) 5(2.7,-1.905) 6(2.7,-0.635) 7(2.7,0.635) 8(2.7,1.905)
  silkscreen extent -1.78,-2.67 1.78,2.79

## Part data
1.65V: library part TestPoint
C1 C2 C3 C7: "0.033µF ±10% 100V Ceramic Capacitor X7R 0805 (2012 Metric)"
C4 C5 C6: "10000pF ±10% 25V Ceramic Capacitor X7R 0805 (2012 Metric)"
C8 C9 C10 C11 C12 C13 C14 C22 C42 C43 C51 C63 C64: "0.1µF ±10% 25V Ceramic Capacitor X7R 0805"
C15: library part EEE-HC1E470XP, "EEE-HC1E470XP"
C16 C18 C19 C20 C21 C23 C29: library part "10uF 25 VDC", "10uF %10 tolerance 25VDC 0805"
C24 C28 C52 C65 C70 C72: library part "0.1uF 25V 0805", "0.1µF ±10% 25V Ceramic Capacitor X7R 0805 (2012Metric)"
C25 C26 C27: library part "220nF 0805", "220nF 0805 50VDC"
C30 C31 C32 C33 C34 C35 C36 C37 C38 C39: "0.1uF 50VDC 0805"
C40 C41 C44 C55: library part "1u 0805"
C45: library part "4.7n 0805"
C46 C61: library part "220p 0805"
C47 C49 C50 C56 C57: library part "1n 0805"
C48 C53 C59 C60: library part "330p 0805"
C54 C58: library part "47p 0805"
C62: library part "47n 0805"
C66 C67 C68: library part "27pF 50V", "CL10 Series 27 pF 50 V ±5 % Tolerance"
C69 C71 C73 C74 C75 C76: library part "100pF 50V", "100pF ±5% 50V Ceramic Capacitor C0G, NP0 0805 (2012 Metric)"
D9 D10 D11 D12 D13 D14 D15 D16 D17 D18 D19: library part LED
J5 J20: library part "DSBU CONN 9 POS"
L1: library part ACM7060
L2 L3 L4 L5 L6 L7 L8 L9: library part "1uH 0805", "1µH Shielded Multilayer Inductor 1.15A 60mOhm 0805 (2012 Metric)"
PS2: "Power Supply", Manufacturer_Name="RECOM Power", Mouser Part Number=919-R-78E5.0-1.0, Arrow Part Number=R-78E5.0-1.0, Arrow Price/Stock=https://www.arrow.com/en/products/r-78e5.0-1.0/recom-power, Datasheet Link=http://www.recom-power.com/pdf/Innoline/R-78Exx-1.0.pdf, Height=10.4mm, Manufacturer_Part_Number=R-78E5.0-1.0, Mouser Price/Stock=https://www.mouser.co.uk/ProductDetail/RECOM-Power/R-78E50-10/?qs=T0XSgvH75d4EsZCU9I5HVA%3D%3D
R1 R2 R3 R10 R53 R54 R57 R58 R60: "Resistor 0805 1k ohm 0.1W"
R4 R5 R6: library part 4k99
R11 R12 R13 R14 R15 R16 R17 R18 R19: library part "2k 0.1W", "2 kOhms ±1% 0.1W, 1/10W Chip Resistor 0603 (1608 Metric) Moisture Resistant Thick Film"
R20 R21 R22 R23 R24 R25 R26 R27 R28 R29 R30 R44 R48 R49 R50 R101: library part "1.24k 0805", "1.24k 0805"
R31 R45 R46 R47 R91 R92 R93 R98 R99 R100: library part "120ohm 0805", "120 Ohms ±5% 0.1W, 1/10W Chip Resistor 0805 (2012 Metric) Moisture Resistant Thick Film"
R32 R33 R34: library part "2.2k 0805", "2.2k 0805"
R35 R36 R37 R38 R39 R40 R41 R42 R43 R96: library part "0ohm 0805", "0 ohm 0805 res"
R51 R52 R55 R56 R59 R62 R63 R64 R70 R72 R78 R81 R83: library part "10k 0.1W 0805", "10k 0.1W 0805"
R61 R84 R85 R86 R90: library part "100ohm 0.1W", "100 Ohms ±1% 0.1W, 1/10W Chip Resistor 0805(2012 Metric) Moisture Resistant Thick Film"
R65 R66: library part "2k 0805"
R67 R82: library part "68k 0805"
R68 R69: library part "3.3k 0805"
R71 R75 R76 R80: library part "11k 0805"
R73 R79: library part "5.1k 0805"
R74 R77: library part "47k 0805"
R87 R88 R89 R94 R95 R97: library part "15k 0805", "15k 0805 0.1W"
U1 U2: "Integrated Circuit", Manufacturer_Name=STMicroelectronics, Mouser Part Number=511-LM339DT, Supplier Part Number 1=LM339DTBR2G, Arrow Part Number=LM339DT, Arrow Price/Stock=https://www.arrow.com/en/products/lm339dt/stmicroelectronics, Datasheet Link=http://www.st.com/st-web-ui/static/active/en/resource/technical/document/datasheet/CD00000460.pdf, Height=1.75mm, Manufacturer_Part_Number=LM339DT, Mouser Price/Stock=https://www.mouser.co.uk/ProductDetail/STMicroelectronics/LM339DT?qs=8q6yV%252BexmWU1LP6UrPvZEQ%3D%3D, Supplier 1=Avnet
U3: "Inverter"
U4: "Integrated Circuit", Manufacturer_Name=Nexperia, Mouser Part Number=771-HEF4043BT652, Arrow Part Number=HEF4043BT,652, Arrow Price/Stock=https://www.arrow.com/en/products/hef4043bt652/nexperia, Datasheet Link=https://assets.nexperia.com/documents/data-sheet/HEF4043B.pdf, Height=1.75mm, Manufacturer_Part_Number=HEF4043BT,652, Mouser Price/Stock=https://www.mouser.com/Search/Refine.aspx?Keyword=771-HEF4043BT652
U6: "TLV2771IDBVR"
U7: "tlv2772cdR"

## Via types
v1: diameter 0.8, hole 0.5, Top Layer to Bottom Layer, 279 vias
v2: diameter 0.5, hole 0.3, Top Layer to Bottom Layer, 82 vias
v3: diameter 3.5, hole 3.2, Top Layer to Bottom Layer, 4 vias

## Nets (pads, with @x,y where several pads share a name; then routed paths per layer and width w, separated by ;. In a path a pad name is that pad's centre, name@x,y a point inside that pad or via, vN(x,y) a via of type N, cw(c..) or ccw(c..) an arc to the next point about the centre after c; other vN are vias at no path point)
12V_N: C15.2 J4.2 L1.2
  other v1: 12.7,119.761 16.129,119.761 20.955,119.888 22.352,119.888 19.939,120.777 12.7,121.158 16.129,121.158 19.939,121.92
12V_P: C15.1 J4.1 L1.1
  other v1: 19.939,124.206 12.7,124.714 16.129,124.714 19.939,125.349 12.7,126.111 16.129,126.111 20.955,126.238 22.352,126.238
+1.65V: 1.65V.1 C59.2 C60.2 C63.1 C64.1 R61.2 R81.1 R83.1 | length 40.1
  Top Layer w0.254: C63.1@65.278,54.234 65.278,51.689 66.929,50.038 1.65V.1@69.342,50.038
  Top Layer w0.508: C63.1@65.278,54.234 65.325,54.187 67.771,54.187 67.804,54.154 70.344,54.154 C59.2@70.358,54.168 70.424,54.102 71.584,54.102 71.882,54.4 71.882,57.106 72.18,57.404 81.236,57.404 81.534,57.106 R61.2@81.534,55.118 81.76,54.892 82.776,54.892 83.312,54.356 83.312,53.34 83.61,53.042 86.316,53.042 C60.2@86.36,53.086 86.393,53.119 88.9,53.119 91.407,53.119 C64.1@91.44,53.152
+3V3: C20.2 C22.1 C24.1 C65.1 C70.1 C72.2 D15.2 D16.2 D17.2 D18.2 D19.2 IC1.3 IC1.5 IC2.16 IC3.16 IC4.16 J2.4 J3.4 L4.1 L9.2 PS1.3 R28.2 R30.2 R35.1 R38.1 R40.1 R94.2 U5.14 | length 43.9
  Top Layer w0.381: v1(64.897,101.854) IC1.3@64.897,103.017
  Top Layer w1.27: PS1.3@17.424,107.899 17.424,107.925 17.45,107.95 v1(19.05,107.95) ; C20.2@18.156,104.648 v1(19.558,104.648) ; R28.2@22.86,98.26 v1(22.86,99.568) ; v1(41.402,42.291) L9.2@41.402,43.688 v1(41.402,43.815) ; v1(53.467,66.04) 53.505,66.002 R38.1@55.118,66.002 R38.1@55.08,66.04 ; v1(53.594,128.397) 55.063,128.397 55.118,128.452 R35.1@55.118,128.524 ; IC1.5@63.627,97.917 v1(63.627,99.187) ; v1(64.516,107.061) 64.567,107.01 64.567,105.425 C24.1@64.582,105.41 ; R30.2@71.59,95.504 v1(72.898,95.504) ; v1(74.676,47.498) 76.327,47.498 L4.1@76.295,47.498 ; IC2.16@82.931,115.062 82.931,115.05 83.854,114.127 85.583,114.127 C65.1@85.598,114.112 85.725,113.985 v1(85.725,112.395) ; IC3.16@83.058,102.746 83.058,102.761 84.328,104.031 84.328,104.394 C70.1@85.852,104.394 v1(85.852,105.664) ; 93.853,43.741 93.853,43.761 93.929,43.837 93.929,45.451 C22.1@93.914,45.466 93.929,45.481 v1@93.929,46.939 ; IC4.16@96.393,85.946 99.12,85.946 99.214,85.852 C72.2@99.314,85.852 v1(99.314,84.328) ; v1(101.854,84.328) R94.2@101.854,85.598 ; v1(103.124,26.416) 104.61,26.416 R40.1@104.648,26.454 ; D18.2@107.188,36.352 v1(107.188,37.973) ; D17.2@107.188,41.944 108.551,41.944 v1(108.585,41.91) ; D16.2@107.188,47.532 108.365,47.532 v1(108.458,47.625) ; D15.2@107.188,54.17 108.526,54.17 v1(108.585,54.229) ; D19.2@107.188,59.724 108.492,59.724 v1(108.585,59.817)
  other v1: 93.98,47.117
+3V3_Filt: C42.2 C44.1 C51.1 L4.2 R62.2 U6.5 U7.8 | length 28.6
  Top Layer w0.508: v2(75.946,56.388) R62.2@75.946,55.146 75.96,55.132 78.472,55.132 C42.2@78.486,55.118 79.712,55.118 80.01,54.82 80.01,51.344 80.056,51.298 U6.5@79.82,51.298 ; C44.1@78.486,44.958 78.486,45.72 78.645,45.879 L4.2@78.645,47.498 78.645,49.562 79.774,50.691 79.774,51.252 U6.5@79.82,51.298 ; v2(78.74,61.214) 79.548,62.022 80.597,62.022 U7.8@80.678,62.103 81.153,62.103 81.976,62.926 C51.1@81.976,64.77 ; U6.5@80.07,51.298 U6.5@79.82,51.298
  Bottom Layer w0.508: v2(75.946,56.388) 76.708,56.388 78.74,58.42 v2(78.74,61.214)
+3V3VA: C10.1 C29.2 L9.1 R13.2 U3.5 | length 9.4
  Top Layer w1.27: C29.2@38.862,45.72 v1(38.862,47.117) ; L9.1@41.402,46.038 43.116,46.038 v1(43.351,45.803) ; U3.5@45.339,48.925 45.548,49.134 47.864,49.134 47.894,49.164 48.822,49.164 v1(49.232,49.574) ; R13.2@48.006,78.486 v1(49.784,78.486)
+5: C18.2 C21.2 J1.2 J2.1 J3.1 J20.7 L8.2 PS1.1 PS2.3 R27.2 R36.2 R39.2 R41.1 R42.1 R43.1 R88.2 R96.2 | length 19.2
  Top Layer w1.27: L8.2@5.334,98.552 v1(5.334,100.33) ; v1(10.287,104.775) 10.299,104.763 11.923,104.763 11.938,104.748 C18.2@11.938,104.648 ; v1(11.176,107.823) 12.776,107.823 12.802,107.848 PS1.1@12.802,107.899 ; R27.2@15.24,98.298 v1(15.24,99.949) ; C21.2@35.56,113.152 v1(35.56,114.808) ; v1(49.53,26.416) 51.13,26.416 51.257,26.543 R41.1@51.308,26.492 ; v1(57.603,130.103) 57.603,128.795 R36.2@57.658,128.74 ; R39.2@57.658,66.04 v1(57.658,67.437) ; v1(73.025,111.506) R88.2@74.93,111.506 ; R42.1@77.978,32.474 v1(77.978,33.909) ; v1(81.915,98.044) 81.915,99.263 R96.2@81.966,99.314 ; v1(93.091,33.782) 93.163,33.71 93.163,32.529 R43.1@93.218,32.474
+5VA: C8.2 C9.2 C11.1 C23.2 L8.1 R11.1 R12.2 R16.1 R18.2 R20.2 R22.2 R51.2 R52.2 R55.2 R56.2 R59.2 U1.3 U2.3 U4.5 U4.16 | length 32.8
  Top Layer w0.508: C8.2@26.797,75.189 26.897,75.189 27.293,74.793 27.293,74.693 27.691,74.295 U1.3@28.993,74.295 ; C9.2@26.924,62.616 27.024,62.616 27.949,61.691 29.069,61.691 U2.3@29.165,61.595
  Top Layer w1.27: v1(5.334,94.742) L8.1@5.334,96.202 ; v1(7.874,94.742) C23.2@7.874,96.398 ; R59.2@14.986,30.48 15.041,30.425 16.311,30.425 v1(16.383,30.353) ; R52.2@14.986,41.402 v1(16.256,41.402) ; R55.2@15.202,52.578 v1(16.637,52.578) ; v1(20.828,54.229) R22.2@22.225,54.229 ; R56.2@21.044,35.56 21.144,35.56 22.179,36.595 v1(22.352,36.595) ; R51.2@21.044,46.482 21.099,46.537 22.388,46.537 v1(22.479,46.628) ; v1(23.622,60.071) R16.1@25.057,60.071 ; v1(23.641,72.517) R11.1@25.095,72.517 ; v1(25.019,75.184) 26.792,75.184 C8.2@26.797,75.189 ; v1(25.4,62.611) 26.919,62.611 C9.2@26.924,62.616 ; v1(27.178,47.879) 27.224,47.833 27.224,46.37 C11.1@27.239,46.355 U4.5@29.337,46.355 ; v1(34.671,52.578) 34.671,51.551 U4.16@34.787,51.435 ; R12.2@40.221,72.517 v1(41.656,72.517) ; R18.2@40.513,59.817 40.568,59.872 41.855,59.872 v1(41.91,59.817) ; R20.2@41.148,85.306 v1(41.148,86.995)
+12: C16.1 C17.1 C19.2 L1.4 L2.1 PS2.1 R26.2 | length 43.7
  Top Layer w1.27: v1(87.63,6.35) L2.1@87.63,8.223
  Bottom Layer w1.27: v1(1.524,85.725) 1.524,91.948 2.54,92.964 30.734,92.964 31.877,94.107 v1(31.877,98.425)
  other v1: 33.401,106.045 32.766,125.857 35.306,125.857
+12_Filt: C41.1 C52.2 L3.2 U8.8 | length 25.1
  Top Layer w0.508: U8.8@87.941,16.637 88.011,16.637 88.138,16.764 90.556,16.764 C52.2@90.81,16.51 91.206,16.906 91.206,17.526 91.714,18.034 97.282,18.034 98.044,17.272 98.044,9.652 96.774,8.382 95.316,8.382 C41.1@95.25,8.448 95.216,8.414 94.012,8.414 93.948,8.35 92.742,8.35 L3.2@92.71,8.318
A-FAULT: IC4.5 J11.8 R48.1 U5.12 | length 84.2
  Top Layer w0.254: IC4.5@91.313,91.346 91.313,90.846 90.129,89.662 85.09,89.662 83.312,87.884 83.312,74.168 85.344,72.136 93.218,72.136 95.504,69.85 95.504,58.928 94.107,57.531 94.107,52.705 92.71,51.308 v2(91.44,51.308) ; v2(91.44,42.926) 92.314,42.052 97.424,42.052 J11.8@98.298,42.926 99.568,44.196 102.108,44.196 102.616,44.704 102.616,46.482 103.241,47.107 104.041,47.107 R48.1@104.394,47.46
  Bottom Layer w0.254: v2(91.44,42.926) 90.424,43.942 90.424,50.292 v2(91.44,51.308)
A-FAULT-FILT_N: C66.2 IC4.7 J23.10 R85.1 | length 62.3
  Top Layer w0.254: IC4.7@88.773,91.346 88.773,91.846 88.946,92.019 89.005,92.019 89.154,92.168 89.154,94.426 89.978,95.25 95.504,95.25 96.012,95.758 96.012,99.143 96.143,99.274 96.143,99.532 96.81,100.199 97.754,100.199 97.877,100.076 102.213,100.076 102.362,100.225 102.362,104.604 102.914,105.156 110.744,105.156 111.467,105.879 111.467,107.916 110.605,108.778 110.246,108.778 110.097,108.629 110.097,108.605 109.574,108.082 109.374,108.082 108.711,108.745 108.31,108.745 108.277,108.712 107.634,108.712 107.485,108.563 107.485,108.341 107.132,107.988 R85.1@106.934,107.988 106.934,107.442 106.172,106.68 103.124,106.68 102.108,107.696 102.108,113.6 103.57,115.062 106.934,115.062 J23.10@108.204,113.792
A-FAULT-FILT_P: C66.1 IC4.6 L5.2 R85.2 | length 46.6
  Top Layer w0.254: IC4.6@90.043,91.346 90.043,91.846 89.87,92.019 89.811,92.019 89.662,92.168 89.662,94.216 90.188,94.742 95.714,94.742 96.52,95.548 96.52,98.933 96.651,99.064 96.651,99.321 97.021,99.691 97.543,99.691 97.666,99.568 102.424,99.568 102.87,100.014 102.87,104.394 103.124,104.648 110.954,104.648 111.975,105.668 111.975,108.127 110.815,109.286 110.246,109.286 110.097,109.435 110.097,109.459 109.574,109.982 C66.1@109.474,109.982 109.374,109.982 108.851,109.459 108.851,109.435 108.702,109.286 108.133,109.286 108.067,109.22 107.634,109.22 107.485,109.369 107.485,109.591 107.132,109.944 R85.2@106.934,109.944 104.75,109.944 L5.2@104.394,110.3
A_FAULT_P: J23.9 L5.1 | length 16.3
  Top Layer w0.254: L5.1@104.394,107.95 102.765,107.95 102.616,108.099 102.616,108.817 102.765,108.966 103.124,108.966 103.378,109.22 103.378,109.474 103.124,109.728 102.87,109.728 102.616,109.982 102.616,110.341 102.765,110.49 103.124,110.49 103.378,110.744 103.378,110.998 103.124,111.252 102.87,111.252 102.616,111.506 102.616,112.224 102.765,112.373 103.124,112.373 103.273,112.522 103.273,112.732 102.721,113.284 102.721,113.494 103.527,114.3 104.14,114.3 104.394,114.046 104.394,112.522 104.648,112.268 105.41,112.268 105.664,112.522 J23.9@105.664,113.792
AHS-PWM: J8.1 R34.1 R91.1 | length 37.8
  Top Layer w0.254: R34.1@66.51,119.634 66.51,119.844 68.58,121.914 68.58,124.714 70.104,126.238 93.218,126.238 93.904,125.552 R91.1@93.904,124.46 94.158,124.206 J8.1@98.298,124.206
AHS_PWM_FILT: C69.1 IC2.1 R91.2 | length 12.6
  Top Layer w0.254: IC2.1@82.804,120.142 87.884,120.142 89.662,121.92 91.948,121.92 92.108,122.08 91.948,122.24 R91.2@91.948,124.46
AHS_PWM_N: IC2.3 J23.2 | length 34.4
  Top Layer w0.381: IC2.3@80.264,120.142 v2(80.264,121.92)
  Bottom Layer w0.254: v2(80.264,121.92) 80.264,121.938 80.518,122.192 80.518,125.014 81.742,126.238 106.035,126.238 107.442,124.831 107.442,124.41 107.639,124.213 107.943,124.213 J23.2@108.204,123.952
AHS_PWM_P: IC2.2 J23.1 | length 34.3
  Top Layer w0.381: IC2.2@81.534,120.142 v2(81.534,121.92)
  Bottom Layer w0.254: v2(81.534,121.92) 81.153,122.301 81.153,122.885 81.458,123.19 81.893,123.19 82.042,123.339 82.042,124.057 81.893,124.206 81.28,124.206 81.026,124.46 81.026,124.714 82.042,125.73 105.824,125.73 106.934,124.62 106.934,124.41 106.737,124.213 106.179,124.213 J23.1@105.918,123.952
ALS-PWM: J8.2 R92.1 | length 5.9
  Top Layer w0.254: R92.1@93.98,119.38 95.25,119.38 95.758,119.888 95.758,120.904 96.52,121.666 J8.2@98.298,121.666
ALS_PWM_FILT: C71.1 IC2.7 R92.2 | length 22.2
  Top Layer w0.254: IC2.7@75.184,120.142 75.184,118.11 75.391,117.903 75.899,117.903 v2(75.946,117.856) ; v2(89.662,119.38) R92.2@92.024,119.38 92.024,116.906 C71.1@92.09,116.84
  Bottom Layer w0.254: v2(75.946,117.856) 81.788,117.856 83.312,119.38 v2(89.662,119.38)
ALS_PWM_N: IC2.5 J23.6 | length 58.5
  Top Layer w0.381: IC2.5@77.724,120.142 v2(77.724,121.92)
  Bottom Layer w0.254: v2(77.724,121.92) 77.343,122.301 77.343,125.423 80.19,128.27 83.312,128.27 83.566,128.016 84.582,128.016 84.836,128.27 85.022,128.27 85.344,128.27 85.852,127.762 86.36,127.762 86.868,128.27 87.376,128.27 87.884,127.762 88.646,127.762 89.154,128.27 89.662,128.27 90.17,127.762 90.678,127.762 91.186,128.27 91.694,128.27 92.202,127.762 92.964,127.762 93.472,128.27 93.98,128.27 94.488,127.762 94.996,127.762 95.504,128.27 96.012,128.27 96.52,127.762 97.282,127.762 97.79,128.27 98.298,128.27 98.806,127.762 99.314,127.762 99.822,128.27 100.33,128.27 100.838,127.762 101.6,127.762 102.108,128.27 102.616,128.27 103.124,127.762 103.632,127.762 104.14,128.27 104.648,128.27 105.156,127.762 105.664,127.762 106.172,128.27 106.68,128.27 107.188,127.762 107.95,127.762 108.458,128.27 108.966,128.27 109.474,127.762 109.982,127.762 110.49,128.27 111.357,128.27 111.506,128.121 111.506,120.236 109.301,118.031 109.091,118.031 108.23,118.892 J23.6@108.23,118.898
ALS_PWM_P: IC2.6 J23.5 | length 58.6
  Top Layer w0.381: IC2.6@76.454,120.142 v2(76.454,121.92)
  Bottom Layer w0.254: v2(76.454,121.92) 76.835,122.301 76.835,125.633 80.065,128.863 111.483,128.863 112.014,128.332 112.014,120.025 109.512,117.523 108.123,117.523 107.035,118.611 105.925,118.611 J23.5@105.664,118.872
B-FAULT: IC4.3 J11.9 R49.1 U5.10 | length 87
  Top Layer w0.254: v2(89.408,50.038) 92.964,50.038 94.996,52.07 94.996,57.15 96.266,58.42 96.266,70.358 93.726,72.898 85.725,72.898 84.074,74.549 84.074,87.376 85.344,88.646 91.186,88.646 92.202,89.662 92.754,89.662 93.217,90.125 93.217,90.21 93.853,90.846 IC4.3@93.853,91.346 ; v2(91.44,41.656) 92.344,40.752 97.562,40.752 97.928,40.386 J11.9@98.298,40.386 99.568,41.656 104.356,41.656 R49.1@104.394,41.618
  Bottom Layer w0.254: v2(89.408,50.038) 89.408,43.626 91.378,41.656 v2(91.44,41.656)
B-FAULT-FILT_N: C67.2 IC4.1 J24.10 R86.1 | length 32.6
  Top Layer w0.254: v2(96.266,92.964) 96.266,92.827 96.012,92.573 96.012,91.495 96.161,91.346 IC4.1@96.393,91.346 ; J24.10@108.458,91.694 107.188,90.424 R86.1@107.188,88.138 107.386,88.138 107.739,87.785 107.739,87.563 107.888,87.414 108.381,87.414 108.485,87.31 108.956,87.31 109.105,87.459 109.105,87.483 109.628,88.006 C67.2@109.728,88.006 109.828,88.006 110.474,87.36 110.71,87.36 110.726,87.376 111.369,87.376 111.623,87.63 v2(111.76,87.63)
  Bottom Layer w0.254: v2(96.266,92.964) 96.266,92.827 96.012,92.573 96.012,88.773 97.409,87.376 111.369,87.376 111.623,87.63 v2(111.76,87.63)
B-FAULT-FILT_P: C67.1 IC4.2 L6.2 R86.2 | length 32.1
  Top Layer w0.254: IC4.2@95.123,91.346 95.355,91.346 95.504,91.495 95.504,92.573 95.25,92.827 v2(95.25,92.964) ; L6.2@104.648,85.788 104.648,85.809 105.021,86.182 R86.2@107.188,86.182 107.386,86.182 107.739,86.535 107.739,86.757 107.888,86.906 108.171,86.906 108.275,86.802 108.956,86.802 109.105,86.653 109.105,86.629 109.628,86.106 C67.1@109.728,86.106 109.828,86.106 110.351,86.629 110.351,86.653 110.55,86.852 110.921,86.852 110.936,86.868 111.369,86.868 111.623,86.614 v2(111.76,86.614)
  Bottom Layer w0.254: v2(95.25,92.964) 95.25,92.827 95.504,92.573 95.504,88.563 97.199,86.868 111.369,86.868 111.623,86.614 v2(111.76,86.614)
B_FAULT_P: J24.9 L6.1 | length 5.6
  Top Layer w0.254: L6.1@104.648,88.138 104.648,88.9 104.902,89.154 106.426,89.154 106.68,89.408 106.68,90.678 105.918,91.44 J24.9@105.918,91.694
BHS-PWM: J8.3 R33.1 R93.1 | length 49.3
  Top Layer w0.254: R33.1@66.51,114.3 66.51,114.51 70.231,118.231 70.231,123.317 72.013,125.099 78.387,125.099 v2(84.582,125.099) ; R93.1@93.904,114.3 94.996,114.3 96.774,116.078 96.774,117.856 98.044,119.126 J8.3@98.298,119.126
  Bottom Layer w0.254: v2(84.582,125.099) 92.325,125.099 J8.3@98.298,119.126
BHS_PWM_FILT: C73.1 IC2.9 R93.2 | length 23.2
  Top Layer w0.254: IC2.9@73.914,115.192 73.914,116.586 74.168,116.84 v2(75.946,116.84) ; v2(89.662,114.3) R93.2@91.948,114.3 91.948,112.014 C73.1@92.202,111.76
  Bottom Layer w0.254: v2(75.946,116.84) 85.852,116.84 86.106,116.586 86.614,116.586 88.9,114.3 v2(89.662,114.3)
BHS_PWM_N: IC2.11 J24.2 | length 53.5
  Top Layer w0.381: v2(76.454,113.03) IC2.11@76.454,115.192
  Bottom Layer w0.254: v2(76.454,113.03) 76.073,112.649 76.073,111.611 81.643,106.041 82.006,106.041 83.82,104.227 83.82,100.248 84.22,99.848 84.22,98.78 83.82,98.38 83.82,98.298 85.852,96.266 103.483,96.266 103.886,96.669 103.886,102.225 105.214,103.553 106.622,103.553 107.442,102.733 107.442,102.312 107.639,102.115 108.197,102.115 J24.2@108.458,101.854
BHS_PWM_P: IC2.10 J24.1 | length 53.5
  Top Layer w0.381: v2(75.184,113.03) IC2.10@75.184,115.192
  Bottom Layer w0.254: v2(75.184,113.03) 75.565,112.649 75.565,111.401 81.433,105.533 81.795,105.533 83.312,104.016 83.312,100.038 83.712,99.637 83.712,98.991 83.312,98.59 83.312,98.088 85.642,95.758 103.694,95.758 104.394,96.458 104.394,102.014 105.425,103.045 106.411,103.045 106.934,102.522 106.934,102.312 106.737,102.115 106.179,102.115 J24.1@105.918,101.854
BLS-PWM: J8.4 R98.1 | length 9.7
  Top Layer w0.254: R98.1@93.98,109.22 94.996,109.22 96.012,110.236 96.012,110.744 96.52,111.252 96.52,114.808 J8.4@98.298,116.586
BLS_PWM_FILT: C74.1 IC2.15 R98.2 | length 16
  Top Layer w0.254: IC2.15@81.534,115.192 81.534,114.507 85.805,110.236 89.408,110.236 90.424,109.22 R98.2@92.024,109.22 92.202,109.042 C74.1@92.202,106.68
BLS_PWM_N: IC2.13 J24.6 | length 64.8
  Top Layer w0.381: v2(78.994,113.03) IC2.13@78.994,115.192
  Bottom Layer w0.254: v2(78.994,113.03) 79.375,112.649 79.375,110.153 80.772,108.756 91.738,97.79 101.556,97.79 102.87,99.104 102.87,105.664 103.378,106.172 103.886,106.172 104.14,105.918 104.14,105.41 104.394,105.156 104.648,105.156 104.902,105.41 104.902,105.918 105.156,106.172 105.41,106.172 105.664,105.918 105.664,105.41 105.918,105.156 106.172,105.156 106.426,105.41 106.426,105.918 106.68,106.172 106.89,106.172 107.188,105.874 107.188,105.664 107.4,105.452 107.611,105.452 108.331,106.172 110.49,106.172 110.998,105.664 110.998,99.568 109.843,98.413 109.843,96.475 109.301,95.933 109.091,95.933 108.458,96.566 J24.6@108.458,96.774
BLS_PWM_P: IC2.14 J24.5 | length 64.7
  Top Layer w0.381: v2(80.264,113.03) IC2.14@80.264,115.192
  Bottom Layer w0.254: v2(80.264,113.03) 79.883,112.649 79.883,110.363 91.948,98.298 101.346,98.298 102.362,99.314 102.362,105.874 103.168,106.68 110.7,106.68 111.506,105.874 111.506,99.358 110.351,98.203 110.351,96.264 109.512,95.425 108.123,95.425 107.035,96.513 106.179,96.513 J24.5@105.918,96.774
C-FAULT: IC4.11 J11.10 R50.1 U5.9 | length 88.8
  Top Layer w0.254: v2(87.63,48.768) 87.648,48.768 87.902,49.022 93.218,49.022 95.758,51.562 95.758,56.642 97.028,57.912 97.028,70.866 94.234,73.66 86.233,73.66 84.836,75.057 84.836,86.868 85.852,87.884 89.408,87.884 90.043,87.249 IC4.11@90.043,85.946 ; v2(91.44,40.386) 91.577,40.386 91.861,40.102 U5.9@93.986,40.102 95.026,40.102 97.028,38.1 98.044,38.1 J11.10@98.298,37.846 100.406,35.738 R50.1@104.394,35.738
  Bottom Layer w0.254: v2(87.63,48.768) 86.614,47.752 86.614,43.434 89.662,40.386 v2(91.44,40.386)
C-FAULT-FILT_N: C68.2 IC4.9 J25.10 R90.1 | length 52.3
  Top Layer w0.254: IC4.9@87.503,85.946 87.735,85.946 87.884,85.797 87.884,82.594 88.69,81.788 89.386,81.788 89.662,81.512 89.662,81.302 89.811,81.153 90.17,81.153 90.319,81.302 90.319,81.556 90.551,81.788 109.772,81.788 111.506,80.054 111.506,65.779 110.967,65.24 110.682,65.24 110.533,65.389 110.533,65.611 110.18,65.964 R90.1@109.982,65.964 109.827,65.964 109.474,66.317 109.474,67.056 108.712,67.818 ; C68.2@107.442,65.908 107.542,65.908 108.065,66.431 108.065,66.917 108.712,67.564 108.712,67.818 ; J25.10@108.712,69.596 108.712,67.818
C-FAULT-FILT_P: C68.1 IC4.10 L7.2 R90.2 | length 50.7
  Top Layer w0.254: IC4.10@88.773,85.946 88.541,85.946 88.392,85.797 88.392,82.804 88.9,82.296 109.982,82.296 112.014,80.264 112.014,65.569 111.177,64.732 110.682,64.732 110.533,64.583 110.533,64.349 R90.2@110.192,64.008 ; L7.2@104.902,63.754 104.902,64.008 C68.1@107.442,64.008 R90.2@109.982,64.008
C_FAULT_P: J25.9 L7.1 | length 3.9
  Top Layer w0.254: L7.1@104.902,66.104 104.902,66.179 105.918,67.195 J25.9@105.918,69.596
CANA-RX: IC1.4 J6.4 | length 22.1
  Top Layer w0.254: J6.4@55.118,116.586 53.594,116.586 53.086,116.078 53.086,114.046 54.356,112.776 58.42,112.776 59.436,111.76 59.436,107.503 63.627,103.312 IC1.4@63.627,103.017
CANA-TX: IC1.1 J6.3 | length 32.5
  Top Layer w0.254: J6.3@55.118,119.126 53.34,119.126 52.578,118.364 52.578,111.76 54.102,110.236 58.166,110.236 58.891,109.511 58.891,107.33 62.738,103.483 62.738,102.108 63.881,100.965 66.78,100.965 67.437,101.622 IC1.1@67.437,103.017
CANA_N: IC1.6 J5.5 R31.1 | length 132.3
  Top Layer w0.254: J5.5@24.705,7.574 24.331,7.574 23.795,7.038 23.548,7.038 23.368,6.858 23.368,5.588 23.876,5.08 25.4,5.08 26.416,6.096 26.416,21.8 28.492,23.876 28.956,23.876 29.21,24.13 29.21,24.384 29.464,24.638 29.718,24.638 29.972,24.384 29.972,24.13 30.184,23.918 30.395,23.918 30.734,24.257 31.115,24.257 31.496,23.876 55.118,23.876 57.15,25.908 57.15,27.686 60.325,30.861 60.325,89.288 65.278,94.241 65.278,94.792 65.129,94.941 64.907,94.941 64.554,95.294 R31.1@64.554,95.504 64.554,95.714 65.278,96.438 65.278,97.345 65.129,97.494 65.025,97.494 64.897,97.622 IC1.6@64.897,97.917
CANA_P: IC1.7 J5.4 R31.2 | length 132.3
  Top Layer w0.254: J5.4@21.935,7.574 22.144,7.574 22.86,6.858 22.86,5.378 23.666,4.572 25.61,4.572 26.924,5.886 26.924,21.59 28.702,23.368 55.328,23.368 57.658,25.698 57.658,27.476 60.833,30.651 60.833,89.077 65.786,94.03 65.786,94.792 65.935,94.941 66.157,94.941 66.51,95.294 R31.2@66.51,95.504 66.51,95.714 65.786,96.438 65.786,97.345 65.935,97.494 66.039,97.494 66.167,97.622 IC1.7@66.167,97.917
CANB_N: J19.2 J20.1 | length 52.2
  Top Layer w0.254: J20.1@46.415,7.574 47.024,6.965 47.397,6.965 47.546,6.816 47.546,5.588 47.038,5.08 44.704,5.08 44.45,5.334 44.45,18.034 46.482,20.066 46.99,20.066 47.244,19.812 47.244,18.288 47.498,18.034 48.006,18.034 48.26,18.288 48.26,19.812 48.514,20.066 49.022,20.066 49.276,19.812 49.276,18.288 49.53,18.034 50.038,18.034 50.292,18.288 50.292,19.812 50.546,20.066 62.292,20.066 62.738,20.512 J19.2@62.738,27.686
CANB_P: J19.1 J20.2 | length 52.3
  Top Layer w0.254: J20.2@49.185,7.574 48.98,7.369 48.203,7.369 48.054,7.22 48.054,5.378 47.248,4.572 44.494,4.572 43.942,5.124 43.942,18.244 46.272,20.574 62.081,20.574 62.23,20.723 62.23,26.162 61.632,26.76 61.632,28.144 62.28,28.792 64.172,28.792 J19.1@65.278,27.686
CHS-PWM: J8.5 R32.1 R99.1 | length 62.5
  Top Layer w0.254: R32.1@66.472,109.22 66.472,109.43 69.354,112.312 69.354,113.633 71.882,116.162 71.882,123.19 72.898,124.206 v2(84.582,124.206) ; R99.1@93.942,104.14 94.996,104.14 96.52,105.664 96.52,110.49 97.028,110.998 97.028,112.776 J8.5@98.298,114.046
  Bottom Layer w0.254: v2(84.582,124.206) 91.186,124.206 96.52,118.872 96.52,114.3 97.028,113.792 98.044,113.792 J8.5@98.298,114.046
CHS_PWM_FILT: C75.1 IC3.1 R99.2 | length 13.2
  Top Layer w0.254: IC3.1@83.058,107.696 88.64,107.696 91.986,104.35 R99.2@91.986,104.14 92.202,103.924 C75.1@92.202,101.6
CHS_PWM_N: IC3.3 J25.2 | length 48.1
  Top Layer w0.254: v2(80.518,104.902) 80.518,104.92 80.772,105.174 80.772,106.757 80.518,107.011 IC3.3@80.518,107.696
  Bottom Layer w0.254: v2(80.518,104.902) 80.518,103.886 81.522,102.882 81.522,98.755 81.134,98.367 81.134,97.721 81.522,97.333 81.522,95.262 87.091,89.693 93.831,82.953 98.377,78.407 106.507,78.407 107.595,79.495 108.451,79.495 J25.2@108.712,79.756